# Altium PCB ADAS_Radar_Layout.PcbDoc
Units mil, origin at the board's own origin, x right, y up, seen from the top; angles counter-clockwise.
Board outline 4270 x 3565 mil, 6 copper layers (Top Layer, Layer 1, GND, Layer 2, PWR, Bottom Layer), stack 32.112 mil thick; 40 components, 65 nets, 691 pads, 46 vias.
Unrouted connection lines stored in the file: 167.
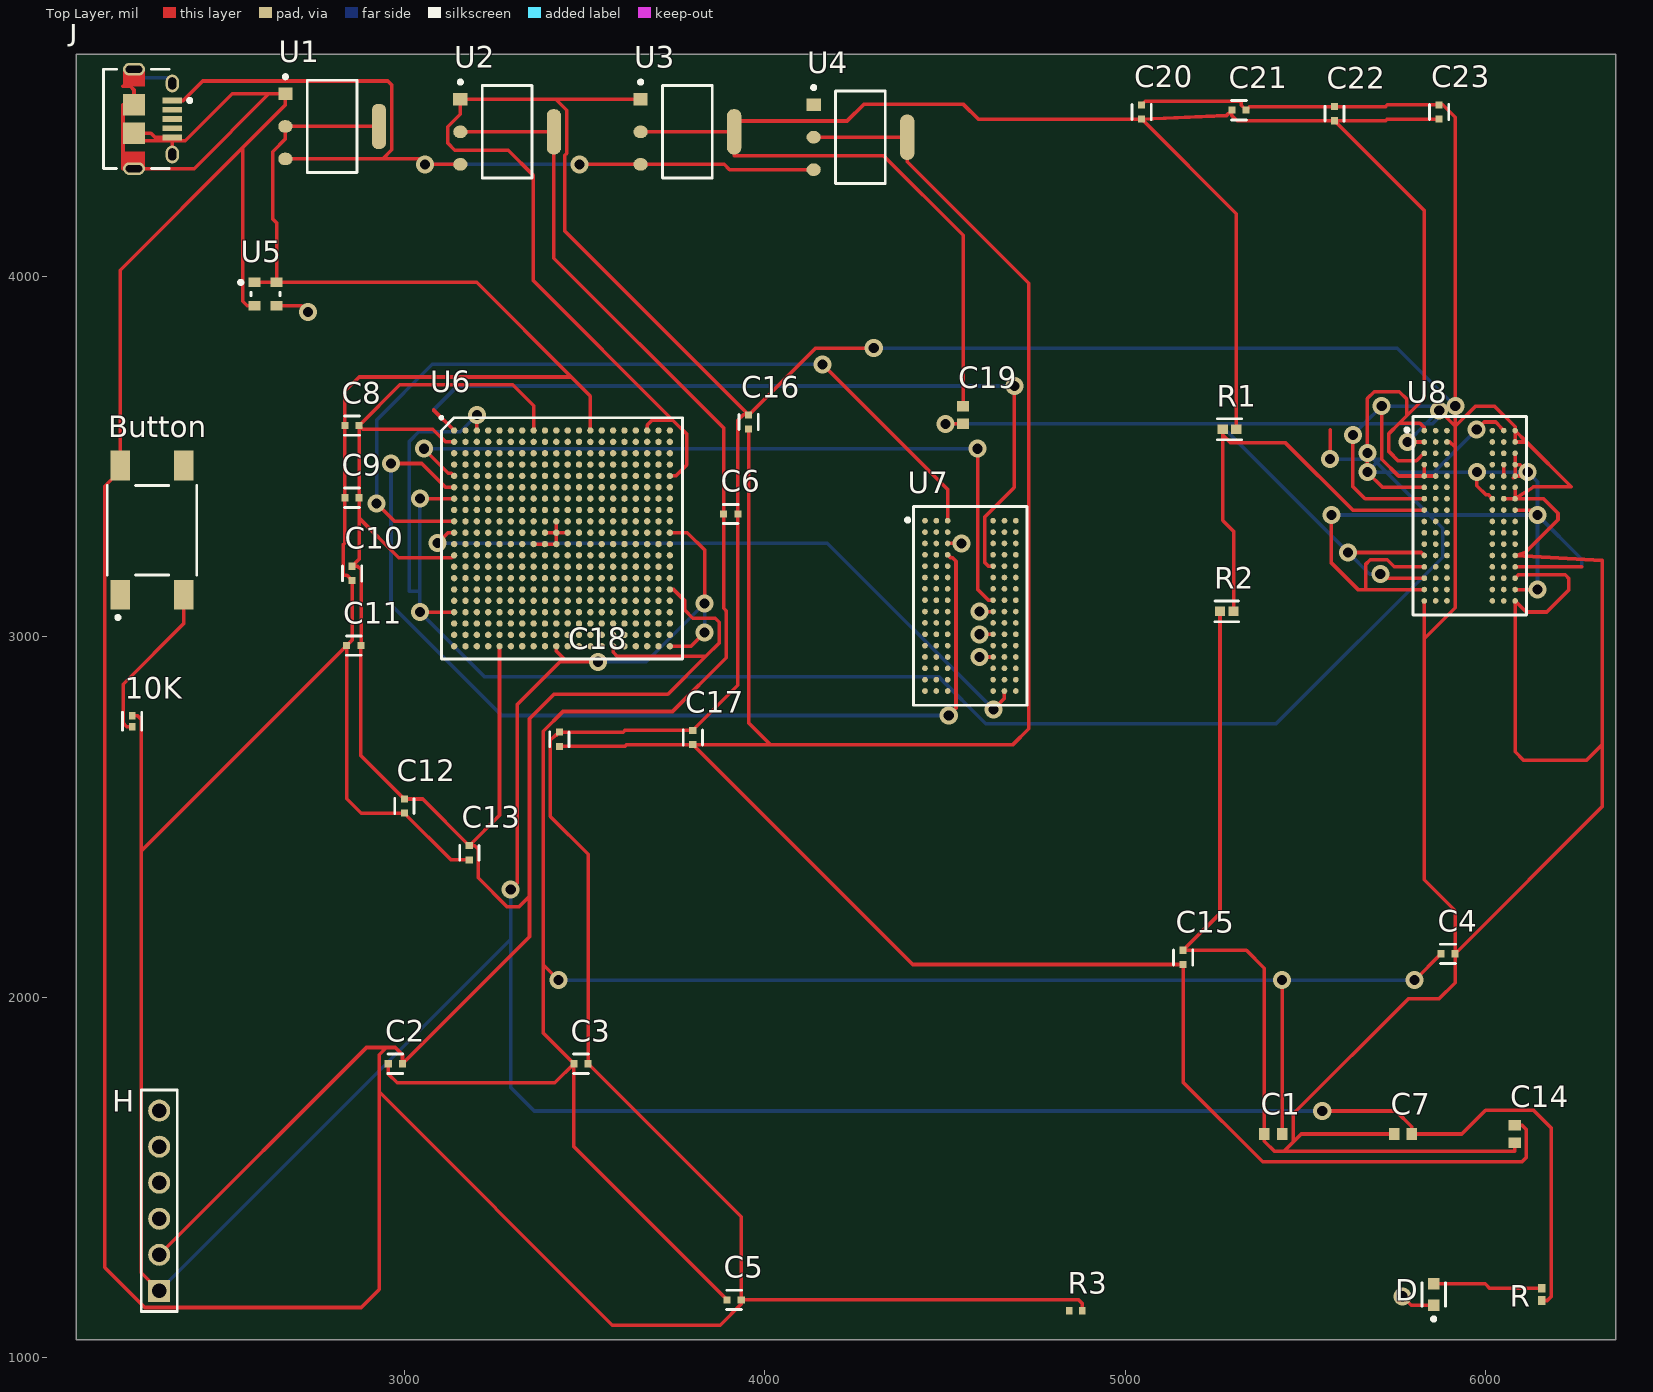
[diagram p0: Top Layer view]
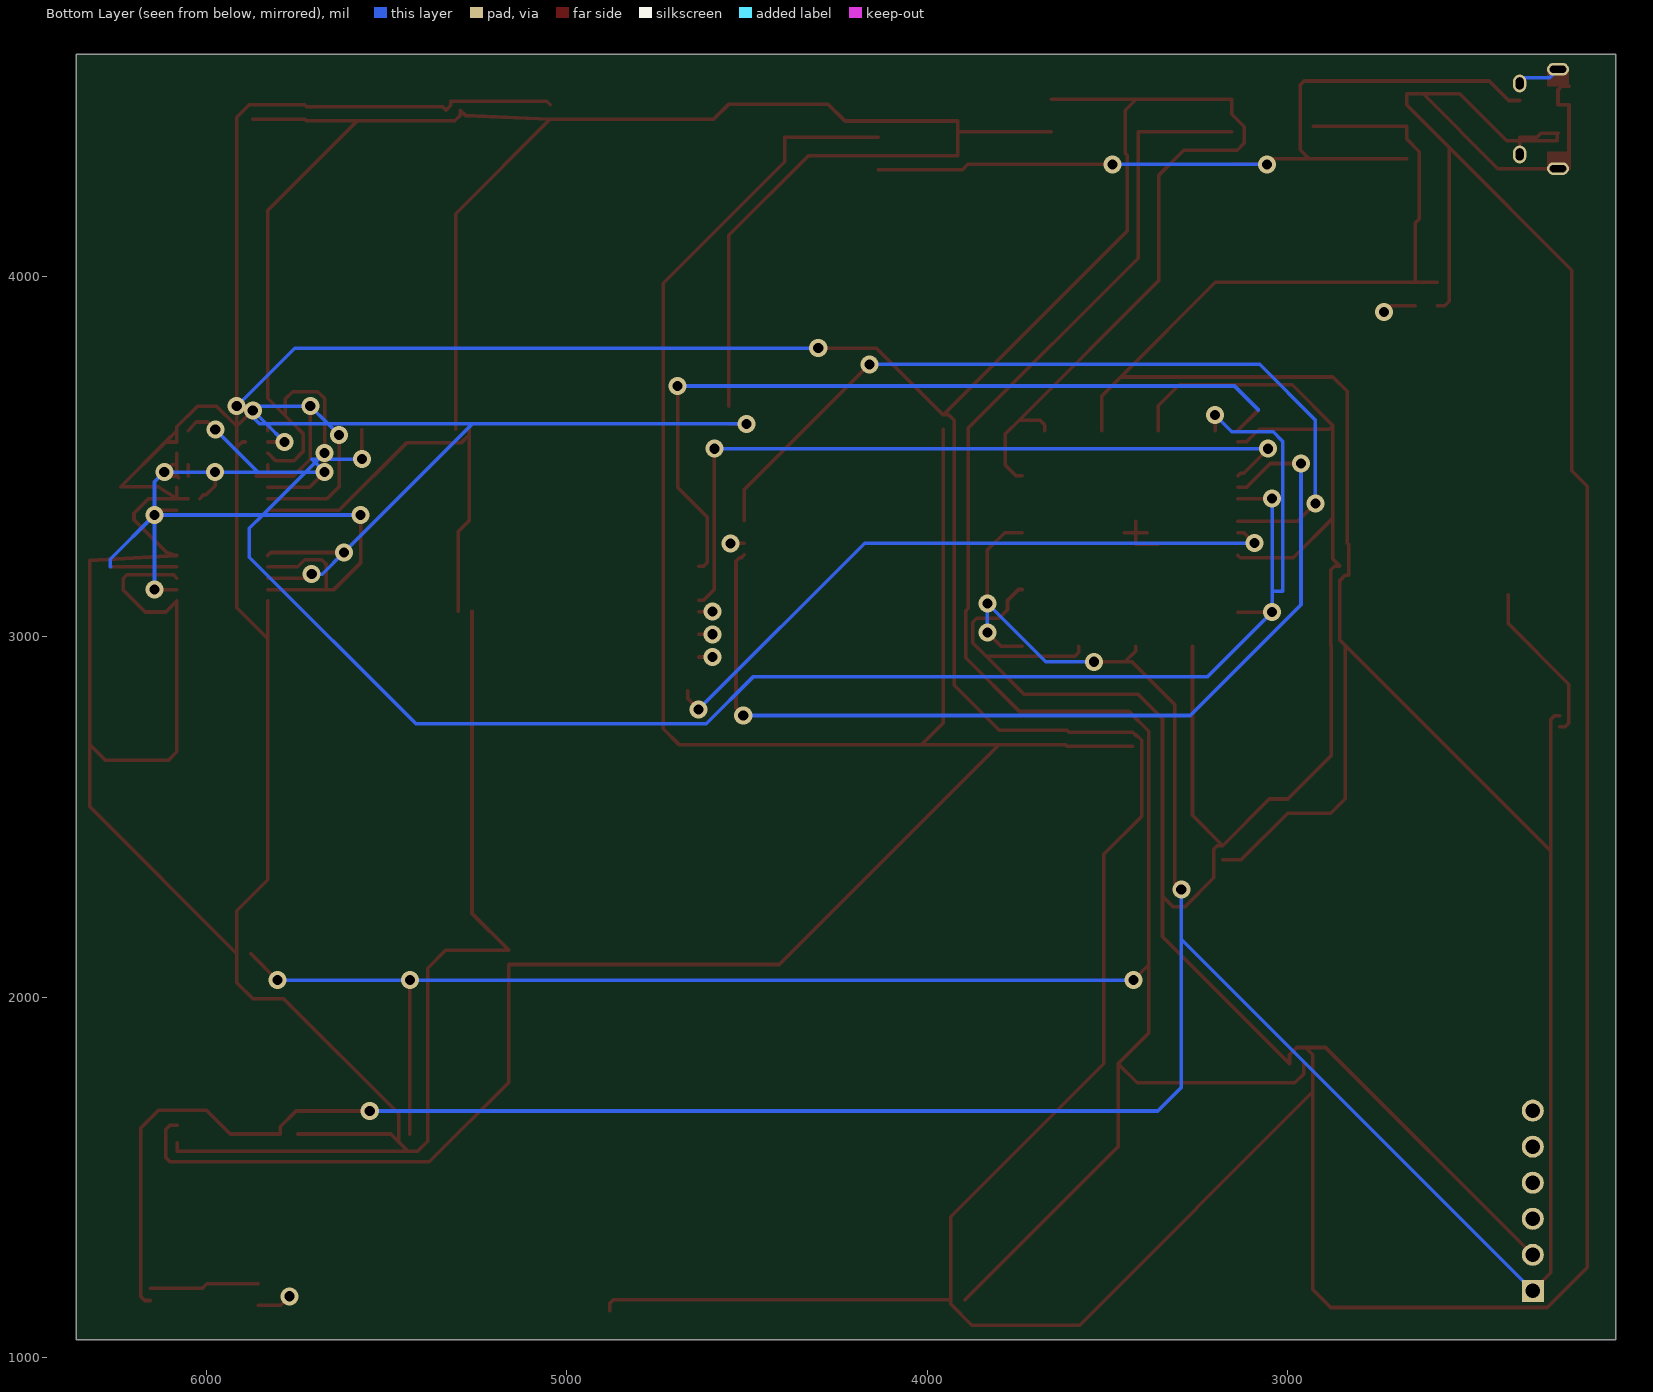
[diagram p1: Bottom Layer view, seen from below]
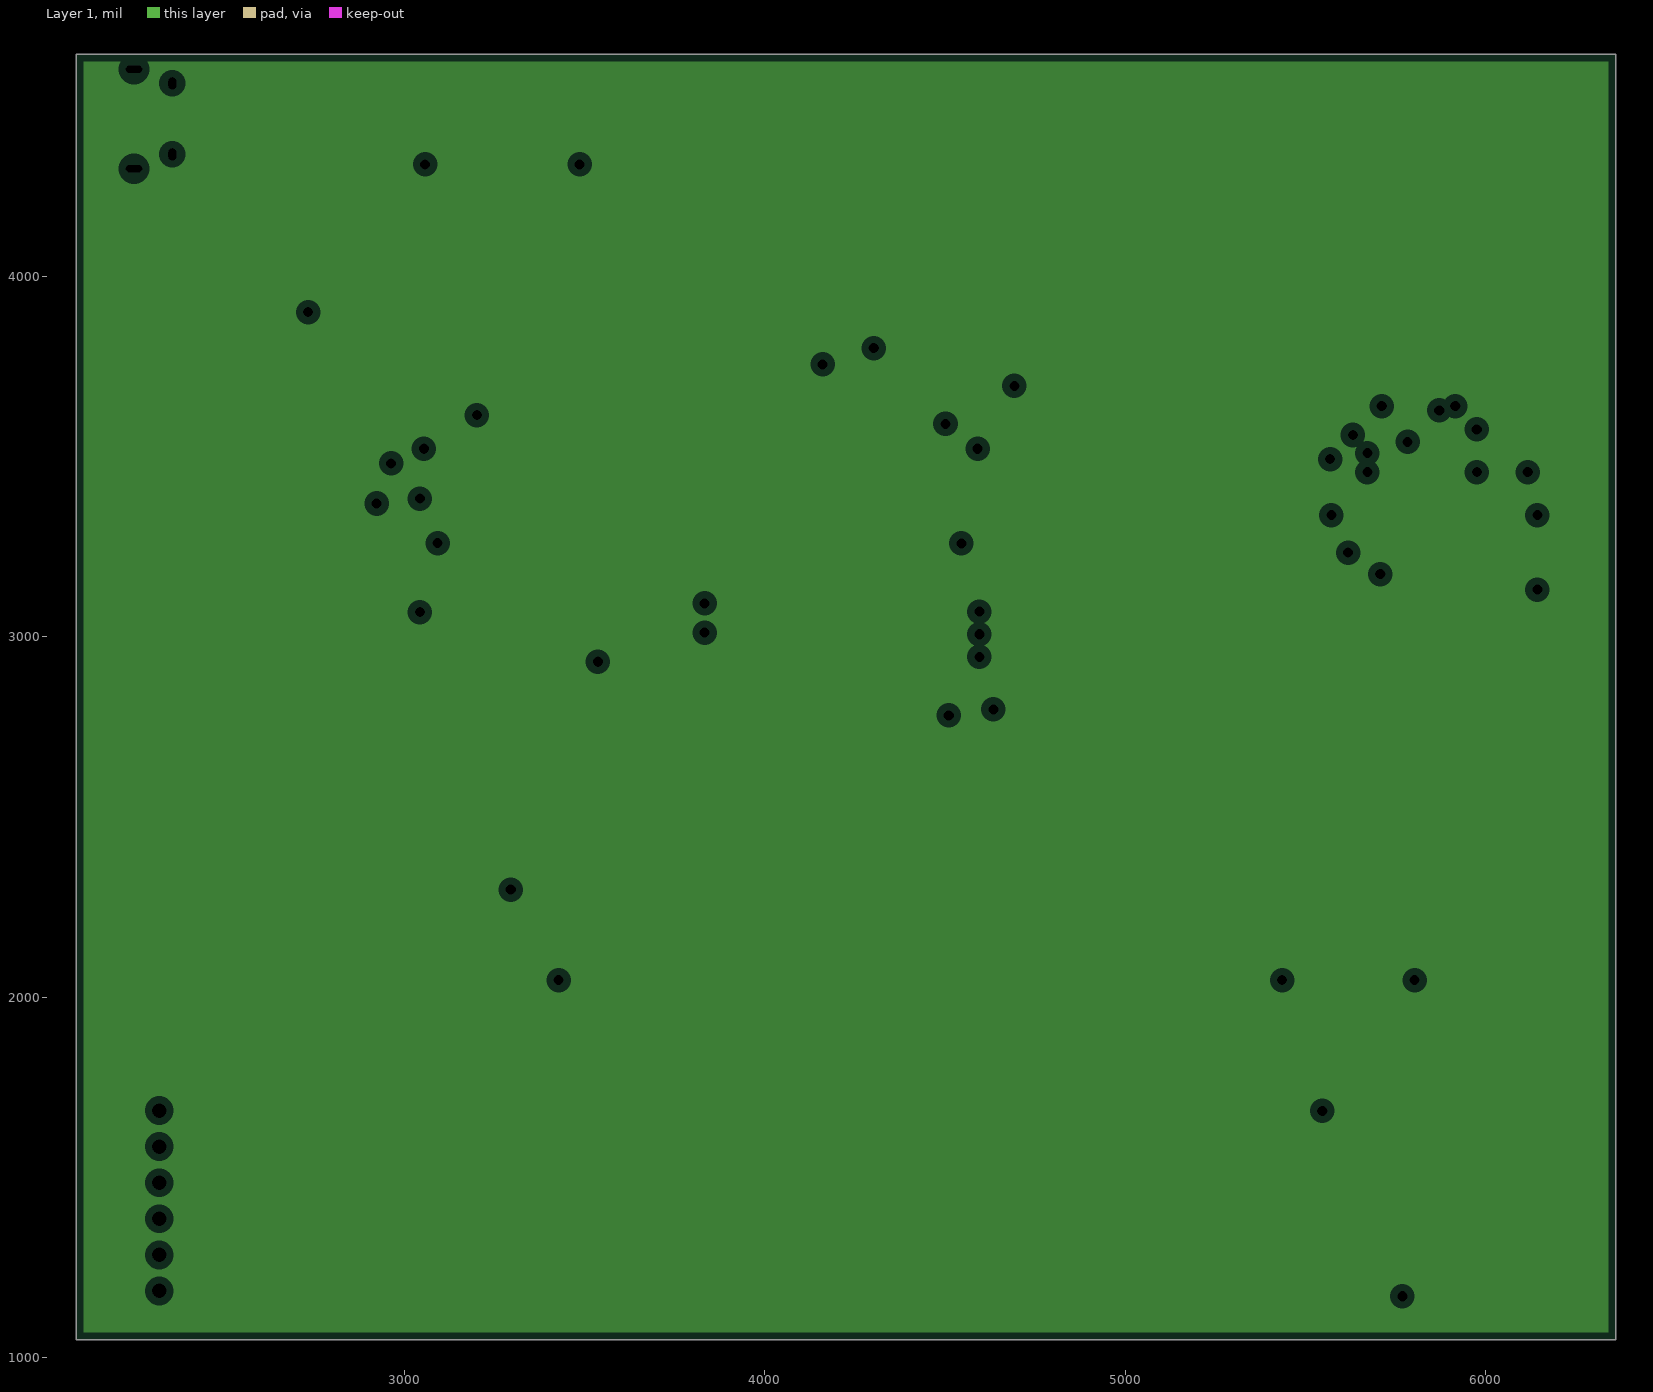
[diagram p2: Layer 1, clearances drawn from the general rule]
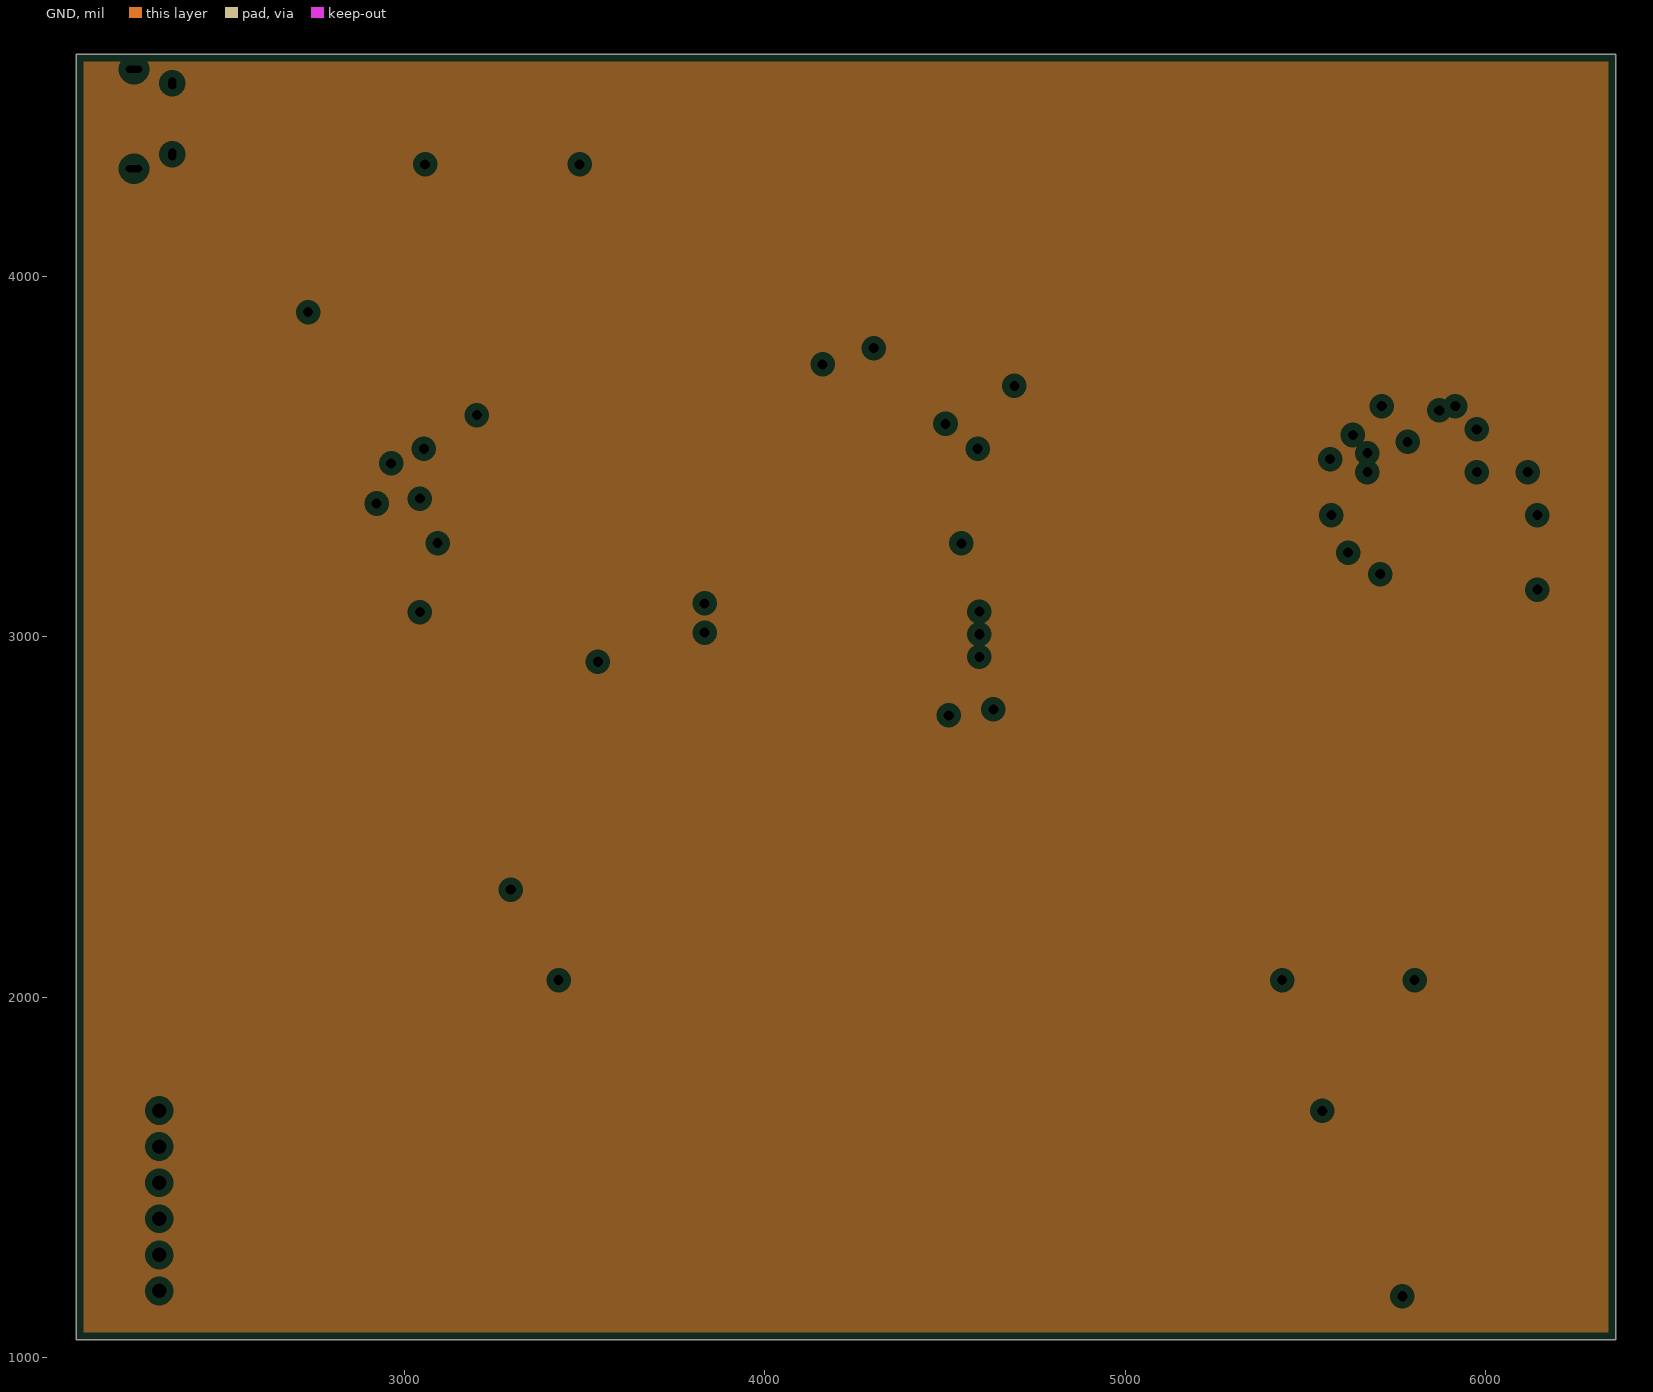
[diagram p3: GND, clearances drawn from the general rule]
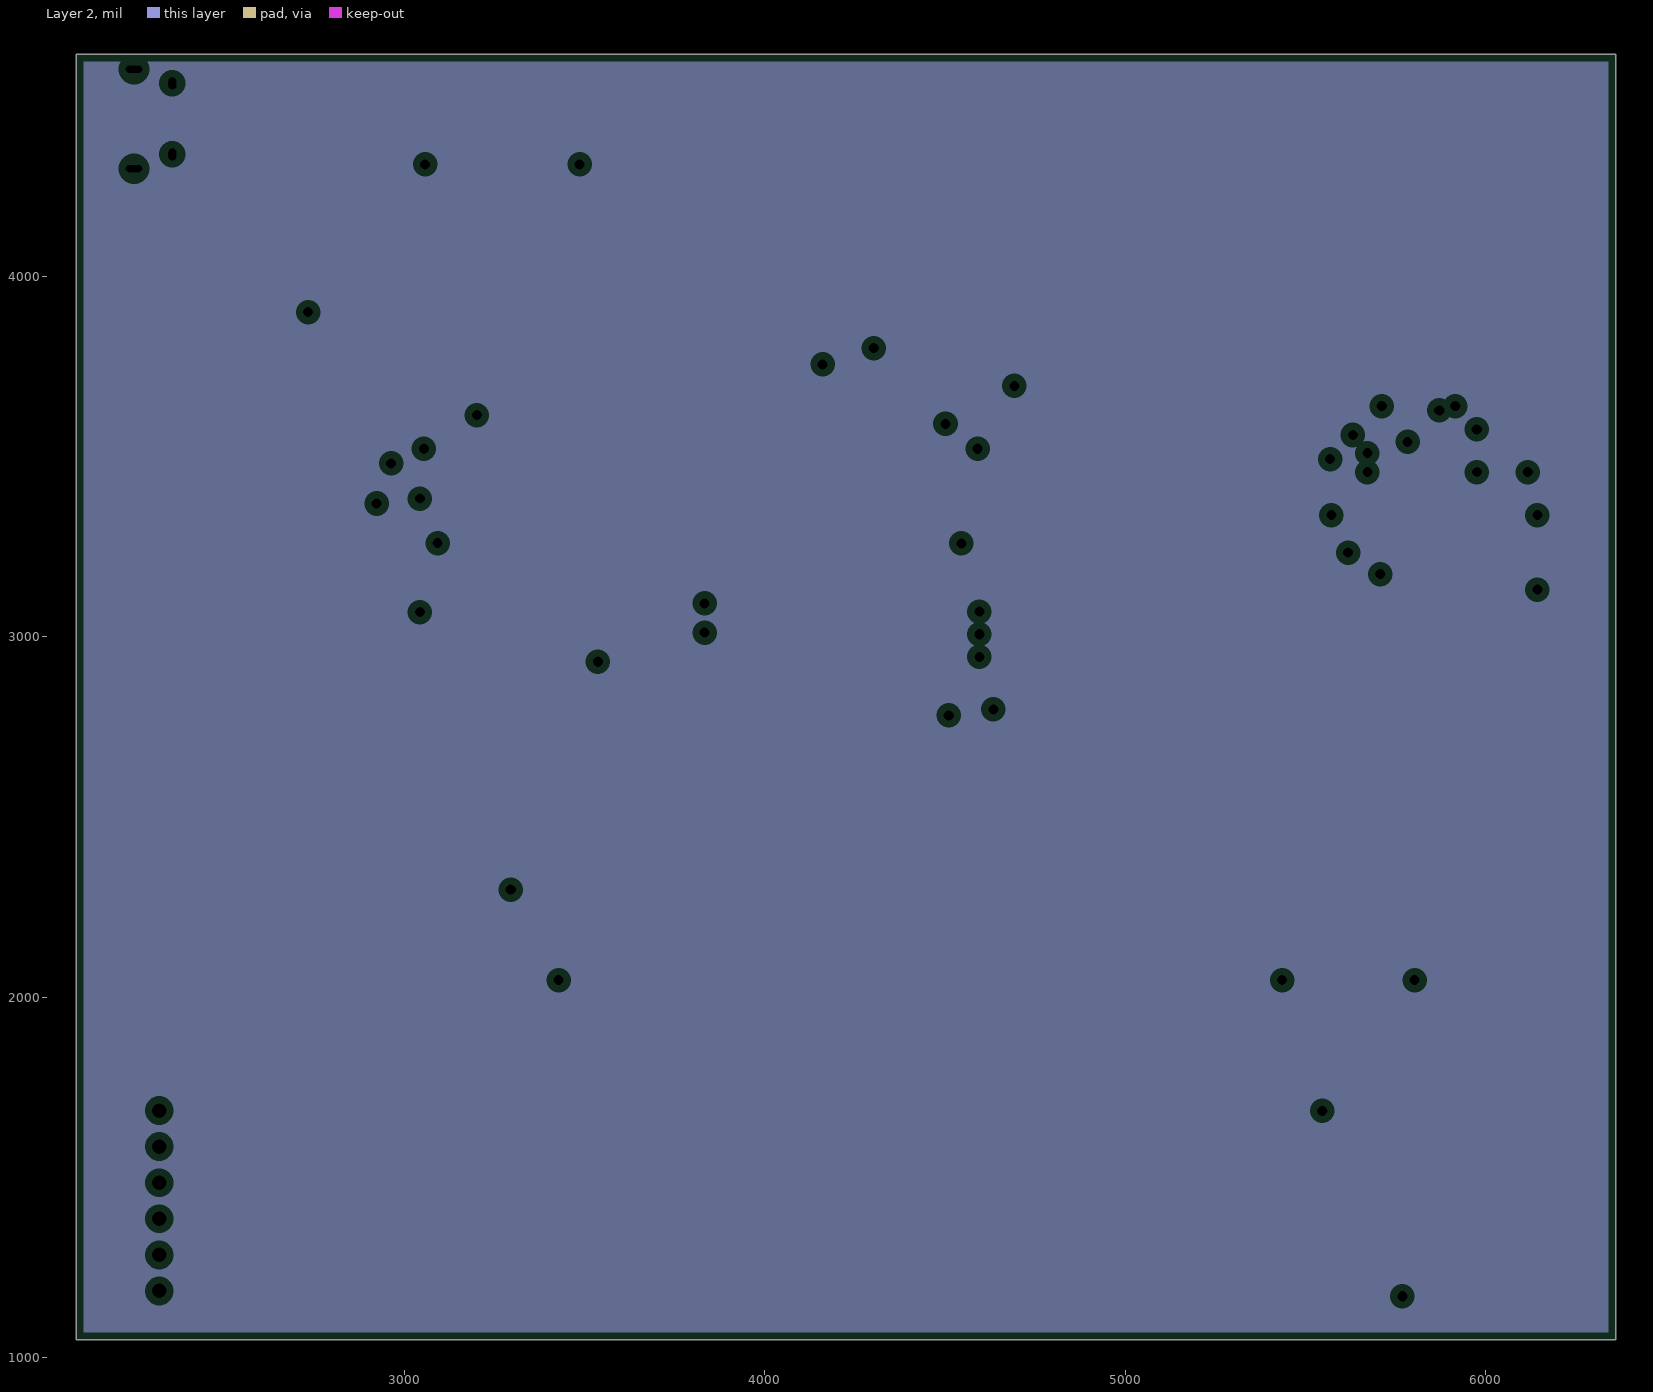
[diagram p4: Layer 2, clearances drawn from the general rule]
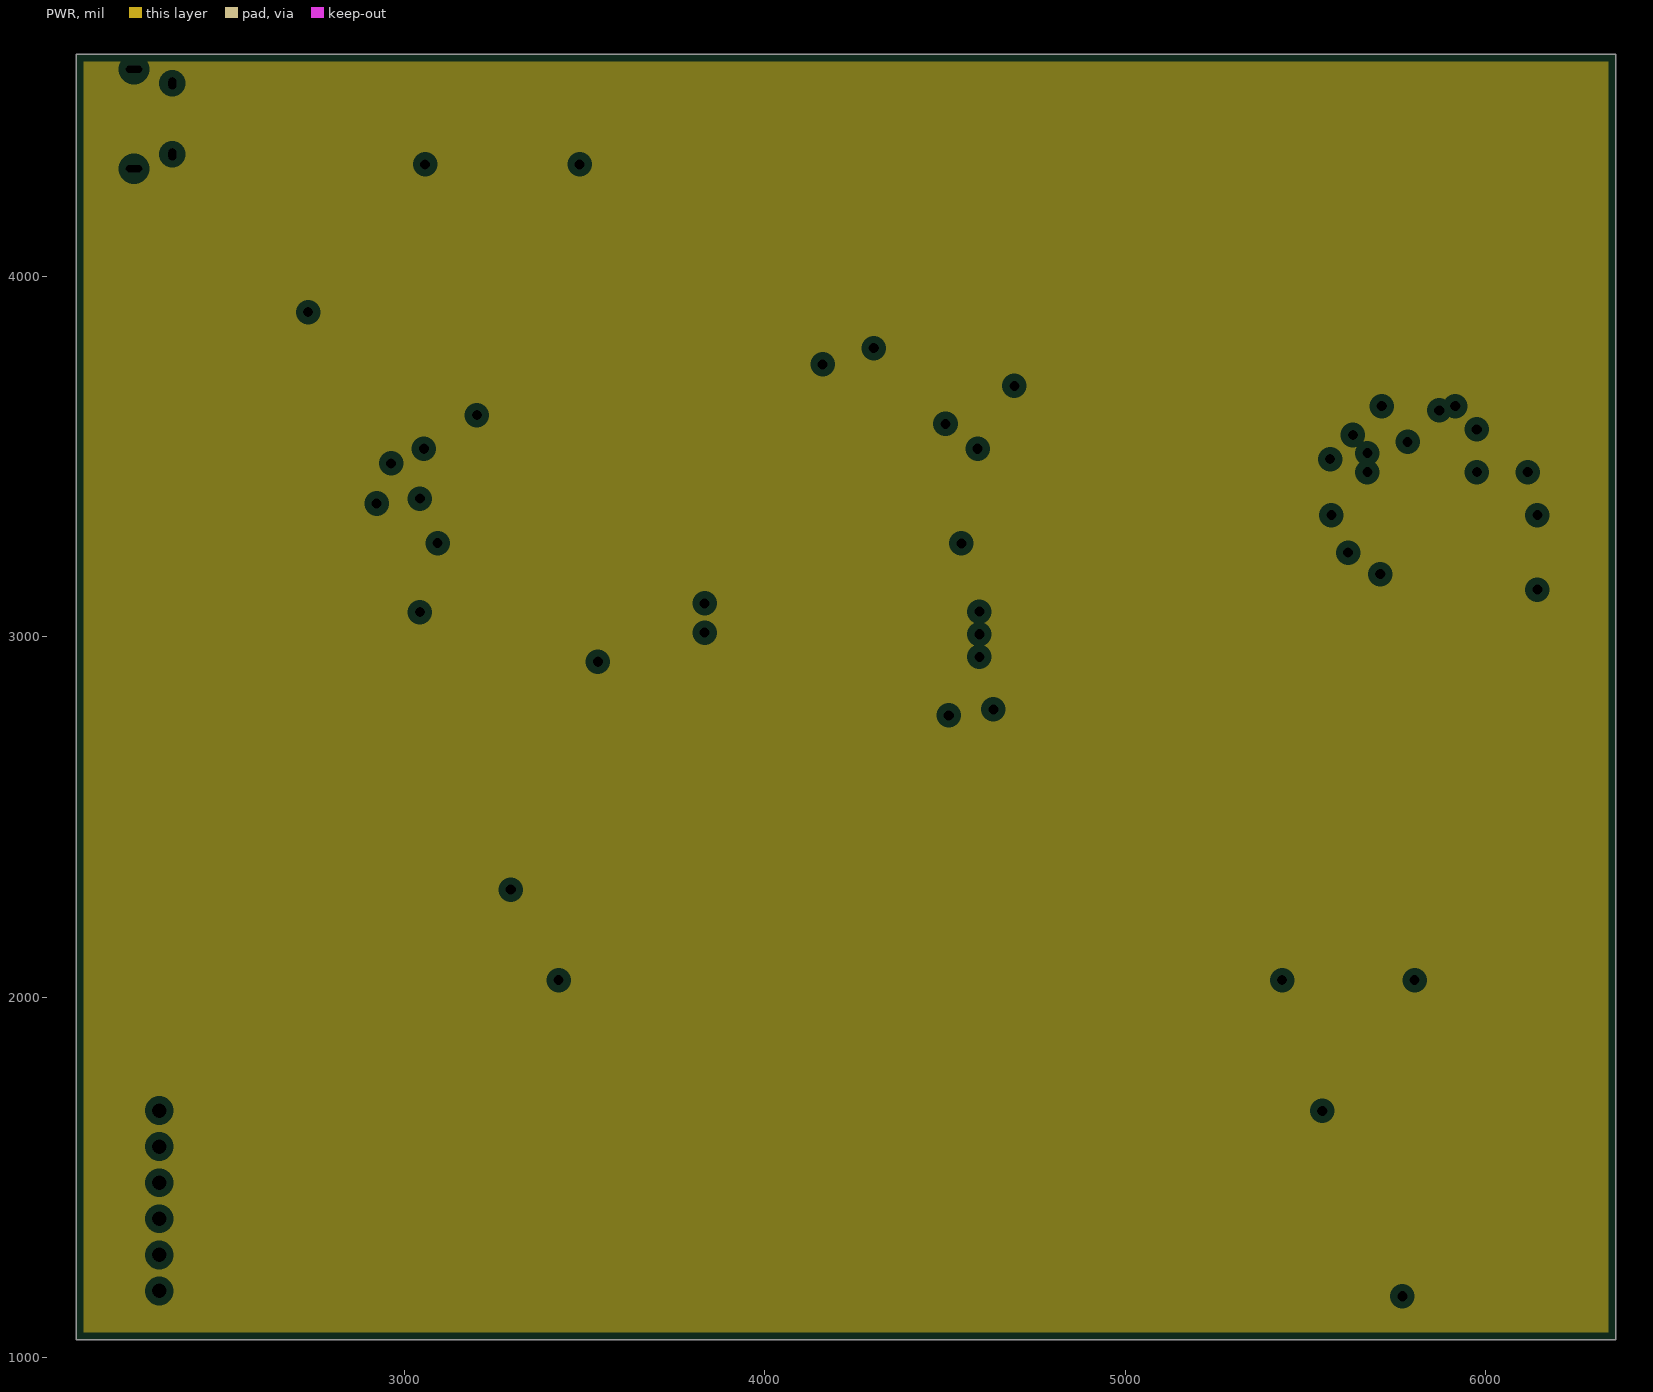
[diagram p5: PWR, clearances drawn from the general rule]

## Layer stack, top to bottom
Top Solder: solder mask 0.4, Solder Resist, Dk 3.5
Top Layer: signal copper 1.4
Dielectric 4: prepreg 2.8, PP-006, Dk 4.1
Layer 1: plane copper 1.378
Dielectric 2: prepreg 2.8, PP-006, Dk 4.1
GND: plane copper 1.378
Dielectric 1: dielectric 12.6, FR-4, Dk 4.8
Layer 2: plane copper 1.378
Dielectric 3: prepreg 2.8, PP-006, Dk 4.1
PWR: plane copper 1.378
Dielectric 5: prepreg 2.8, PP-006, Dk 4.1
Bottom Layer: signal copper 1.4
Bottom Solder: solder mask 0.4, Solder Resist, Dk 3.5

## Board outline
2090,1050 6360,1050 6360,4615 2090,4615

## Design rules (kind name [scope] priority, off if disabled: settings)
Clearance [All] p1: gap=10 ignorepadtopadclearanceinfootprint=FALSE
PlaneClearance [All] p1: clearance=20
PlaneConnect [All] p1: planeconnectstyle=Relief reliefexpansion=20 reliefentries=4 reliefconductorwidth=10 reliefairgap=10
PolygonConnect [All] p1: connectstyle=Relief reliefconductorwidth=10 reliefentries=4 polygonreliefangle="90 Angle" airgapwidth=10
RoutingVias [All] p1: holewidth=28 width=50 viastyle="Through Hole" minholewidth=28 minwidth=50 maxholewidth=28 maxwidth=50
SolderMaskExpansion [All] p1: expansion=4 istentingtop=FALSE
SupplyNets "Schematic Supply Nets" [InNet('GND')] p1: voltage=0.000
Width [All] p1: maxlimit=10 minlimit=10 preferedwidth=10
28 further rules are at their usual default settings.

## Components (designator, comment, footprint, x,y, rotation, side; value= is the part's Value field where it differs from the comment)
10K "RC0402JR-0710KL" FP-RC0402-0_4-IPC_C 2245,2765 r90 top
Button "4-1437565-1" FP-4-1437565-1-MFG 2300,3295 r90 top
C1 "CL10A475KQ8NNNC" CAPC1608X90X30LL10T20 5410,1620 r0 top
C2 "CC0402KRX7R9BB104" FP-CC0402-MFG 2975,1815 r0 top value="100 nF"
C3 "CC0402KRX7R9BB104" FP-CC0402-MFG 3490,1815 r0 top value="100 nF"
C4 "CC0402KRX7R9BB104" FP-CC0402-MFG 5895,2120 r0 top value="100 nF"
C5 "CC0402KRX7R9BB104" FP-CC0402-MFG 3914.68,1160 r0 top value="100 nF"
C6 "CC0402KRX7R9BB104" FP-CC0402-MFG 3905.32,3340 r0 top value="100 nF"
C7 "CL10A475KQ8NNNC" CAPC1608X90X30LL10T20 5770,1620 r0 top
C8 "CC0402KRX7R9BB104" FP-CC0402-MFG 2854.68,3585 r0 top value="100 nF"
C9 "CC0402KRX7R9BB104" FP-CC0402-MFG 2854.68,3385 r0 top value="100 nF"
C10 "CC0402KRX7R9BB104" FP-CC0402-MFG 2855,3175.32 r90 top value="100 nF"
C11 "CC0402KRX7R9BB104" FP-CC0402-MFG 2859.68,2975 r0 top value="100 nF"
C12 "CC0402KRX7R9BB104" FP-CC0402-MFG 3000,2529.68 r90 top value="100 nF"
C13 "CC0402KRX7R9BB104" FP-CC0402-MFG 3180,2400.32 r90 top value="100 nF"
C14 "CL10A475KQ8NNNC" CAPC1608X90X30LL10T20 6080,1620 r90 top
C15 "CC0402KRX7R9BB104" FP-CC0402-MFG 5160,2110 r90 top value="100 nF"
C16 "CC0402KRX7R9BB104" FP-CC0402-MFG 3955,3595 r90 top value="100 nF"
C17 "CC0402KRX7R9BB104" FP-CC0402-MFG 3800,2720 r90 top value="100 nF"
C18 "CC0402KRX7R9BB104" FP-CC0402-MFG 3430,2715 r90 top value="100 nF"
C19 "CL10A475KQ8NNNC" CAPC1608X90X30LL10T20 4550,3614.61 r90 top
C20 "CC0402KRX7R9BB104" FP-CC0402-MFG 5045,4455 r90 top value="100 nF"
C21 "CC0402KRX7R9BB104" FP-CC0402-MFG 5315,4460 r0 top value="100 nF"
C22 "CC0402KRX7R9BB104" FP-CC0402-MFG 5580,4450.31 r90 top value="100 nF"
C23 "CC0402KRX7R9BB104" FP-CC0402-MFG 5870,4455 r90 top value="100 nF"
D "LTST-C190KRKT" FP-LTST-C190KRKT-MFG 5855,1175 r90 top
H "TSW-106-07-G-S" SMTC-TSW-106-07-X-S 2320,1185 r90 top
J "10118194-0001LF" FCI-10118194-0001LF-5_V 2303.15,4435.63 r270 top
R "RC0402JR-07330RL" RESC1005X40X25NL05T10 6155,1175 r90 top
R1 "RC0402FR-071KL" FP-RC0402-0_4-IPC_A 5288.84,3575 r0 top
R2 "RC0402FR-071KL" FP-RC0402-0_4-IPC_A 5281.16,3070 r0 top
R3 "240R 1% 0402(1005)" RESC0402(1005)_L 4862.28,1130 r0 top value="240.00 Ohm"
U1 "AMS1117-3.3" FP-AMS1117-IPC_C 2799.72,4415 r0 top
U2 "Regulator 1V0" FP-AMS1117-IPC_C 3285,4400 r0 top
U3 "Regulator 1.5V" FP-AMS1117-IPC_C 3785,4400 r0 top
U4 "Regulator 1.8V" FP-AMS1117-IPC_C 4265,4385 r0 top
U5 "DSC1001DI1-033.3300" FP-CDFN2520-4LD-PL-1-MFG 2615,3950 r0 top
U6 "XC7Z020-1CLG400C" BGA400C80P20X20_1700X1700X160 3437.24,3272.24 r0 top
U7 "MT41K256M16TW-107:P" FP-TW-IPC_C 4570,3085 r0 top
U8 "MT41K256M16TW-107:P" FP-TW-IPC_C 5955,3335 r0 top

## Footprints (in the part's own frame and the unit in brackets; to place one, negate y for a bottom-side part, rotate by r counter-clockwise, add the part's x,y. Pads: shape width x height; smd on the part's side, far side on the other; paste and mask are expansions set on the pad)
BGA400C80P20X20_1700X1700X160 [mm]
  round 0.45 smd: A1(-7.6,7.6) A2(-6.8,7.6) A3(-6,7.6) A4(-5.2,7.6) A5(-4.4,7.6) A6(-3.6,7.6) A7(-2.8,7.6) A8(-2,7.6) A9(-1.2,7.6) A10(-0.4,7.6) A11(0.4,7.6) A12(1.2,7.6) A13(2,7.6) A14(2.8,7.6) A15(3.6,7.6) A16(4.4,7.6) A17(5.2,7.6) A18(6,7.6) A19(6.8,7.6) A20(7.6,7.6) B1(-7.6,6.8) B2(-6.8,6.8) B3(-6,6.8) B4(-5.2,6.8) B5(-4.4,6.8) B6(-3.6,6.8) B7(-2.8,6.8) B8(-2,6.8) B9(-1.2,6.8) B10(-0.4,6.8) B11(0.4,6.8) B12(1.2,6.8) B13(2,6.8) B14(2.8,6.8) B15(3.6,6.8) B16(4.4,6.8) B17(5.2,6.8) B18(6,6.8) B19(6.8,6.8) B20(7.6,6.8) C1(-7.6,6) C2(-6.8,6) C3(-6,6) C4(-5.2,6) C5(-4.4,6) C6(-3.6,6) C7(-2.8,6) C8(-2,6) C9(-1.2,6) C10(-0.4,6) C11(0.4,6) C12(1.2,6) C13(2,6) C14(2.8,6) C15(3.6,6) C16(4.4,6) C17(5.2,6) C18(6,6) C19(6.8,6) C20(7.6,6) D1(-7.6,5.2) D2(-6.8,5.2) D3(-6,5.2) D4(-5.2,5.2) D5(-4.4,5.2) D6(-3.6,5.2) D7(-2.8,5.2) D8(-2,5.2) D9(-1.2,5.2) D10(-0.4,5.2) D11(0.4,5.2) D12(1.2,5.2) D13(2,5.2) D14(2.8,5.2) D15(3.6,5.2) D16(4.4,5.2) D17(5.2,5.2) D18(6,5.2) D19(6.8,5.2) D20(7.6,5.2) E1(-7.6,4.4) E2(-6.8,4.4) E3(-6,4.4) E4(-5.2,4.4) E5(-4.4,4.4) E6(-3.6,4.4) E7(-2.8,4.4) E8(-2,4.4) E9(-1.2,4.4) E10(-0.4,4.4) E11(0.4,4.4) E12(1.2,4.4) E13(2,4.4) E14(2.8,4.4) E15(3.6,4.4) E16(4.4,4.4) E17(5.2,4.4) E18(6,4.4) E19(6.8,4.4) E20(7.6,4.4) F1(-7.6,3.6) F2(-6.8,3.6) F3(-6,3.6) F4(-5.2,3.6) F5(-4.4,3.6) F6(-3.6,3.6) F7(-2.8,3.6) F8(-2,3.6) F9(-1.2,3.6) F10(-0.4,3.6) F11(0.4,3.6) F12(1.2,3.6) F13(2,3.6) F14(2.8,3.6) F15(3.6,3.6) F16(4.4,3.6) F17(5.2,3.6) F18(6,3.6) F19(6.8,3.6) F20(7.6,3.6) G1(-7.6,2.8) G2(-6.8,2.8) G3(-6,2.8) G4(-5.2,2.8) G5(-4.4,2.8) G6(-3.6,2.8) G7(-2.8,2.8) G8(-2,2.8) G9(-1.2,2.8) G10(-0.4,2.8) G11(0.4,2.8) G12(1.2,2.8) G13(2,2.8) G14(2.8,2.8) G15(3.6,2.8) G16(4.4,2.8) G17(5.2,2.8) G18(6,2.8) G19(6.8,2.8) G20(7.6,2.8) H1(-7.6,2) H2(-6.8,2) H3(-6,2) H4(-5.2,2) H5(-4.4,2) H6(-3.6,2) H7(-2.8,2) H8(-2,2) H9(-1.2,2) H10(-0.4,2) H11(0.4,2) H12(1.2,2) H13(2,2) H14(2.8,2) H15(3.6,2) H16(4.4,2) H17(5.2,2) H18(6,2) H19(6.8,2) H20(7.6,2) J1(-7.6,1.2) J2(-6.8,1.2) J3(-6,1.2) J4(-5.2,1.2) J5(-4.4,1.2) J6(-3.6,1.2) J7(-2.8,1.2) J8(-2,1.2) J9(-1.2,1.2) J10(-0.4,1.2) J11(0.4,1.2) J12(1.2,1.2) J13(2,1.2) J14(2.8,1.2) J15(3.6,1.2) J16(4.4,1.2) J17(5.2,1.2) J18(6,1.2) J19(6.8,1.2) J20(7.6,1.2) K1(-7.6,0.4) K2(-6.8,0.4) K3(-6,0.4) K4(-5.2,0.4) K5(-4.4,0.4) K6(-3.6,0.4) K7(-2.8,0.4) K8(-2,0.4) K9(-1.2,0.4) K10(-0.4,0.4) K11(0.4,0.4) K12(1.2,0.4) K13(2,0.4) K14(2.8,0.4) K15(3.6,0.4) K16(4.4,0.4) K17(5.2,0.4) K18(6,0.4) K19(6.8,0.4) K20(7.6,0.4) L1(-7.6,-0.4) L2(-6.8,-0.4) L3(-6,-0.4) L4(-5.2,-0.4) L5(-4.4,-0.4) L6(-3.6,-0.4) L7(-2.8,-0.4) L8(-2,-0.4) L9(-1.2,-0.4) L10(-0.4,-0.4) L11(0.4,-0.4) L12(1.2,-0.4) L13(2,-0.4) L14(2.8,-0.4) L15(3.6,-0.4) L16(4.4,-0.4) L17(5.2,-0.4) L18(6,-0.4) L19(6.8,-0.4) L20(7.6,-0.4) M1(-7.6,-1.2) M2(-6.8,-1.2) M3(-6,-1.2) M4(-5.2,-1.2) M5(-4.4,-1.2) M6(-3.6,-1.2) M7(-2.8,-1.2) M8(-2,-1.2) M9(-1.2,-1.2) M10(-0.4,-1.2) M11(0.4,-1.2) M12(1.2,-1.2) M13(2,-1.2) M14(2.8,-1.2) M15(3.6,-1.2) M16(4.4,-1.2) M17(5.2,-1.2) M18(6,-1.2) M19(6.8,-1.2) M20(7.6,-1.2) N1(-7.6,-2) N2(-6.8,-2) N3(-6,-2) N4(-5.2,-2) N5(-4.4,-2) N6(-3.6,-2) N7(-2.8,-2) N8(-2,-2) N9(-1.2,-2) N10(-0.4,-2) N11(0.4,-2) N12(1.2,-2) N13(2,-2) N14(2.8,-2) N15(3.6,-2) N16(4.4,-2) N17(5.2,-2) N18(6,-2) N19(6.8,-2) N20(7.6,-2) P1(-7.6,-2.8) P2(-6.8,-2.8) P3(-6,-2.8) P4(-5.2,-2.8) P5(-4.4,-2.8) P6(-3.6,-2.8) P7(-2.8,-2.8) P8(-2,-2.8) P9(-1.2,-2.8) P10(-0.4,-2.8) P11(0.4,-2.8) P12(1.2,-2.8) P13(2,-2.8) P14(2.8,-2.8) P15(3.6,-2.8) P16(4.4,-2.8) P17(5.2,-2.8) P18(6,-2.8) P19(6.8,-2.8) P20(7.6,-2.8) R1(-7.6,-3.6) R2(-6.8,-3.6) R3(-6,-3.6) R4(-5.2,-3.6) R5(-4.4,-3.6) R6(-3.6,-3.6) R7(-2.8,-3.6) R8(-2,-3.6) R9(-1.2,-3.6) R10(-0.4,-3.6) R11(0.4,-3.6) R12(1.2,-3.6) R13(2,-3.6) R14(2.8,-3.6) R15(3.6,-3.6) R16(4.4,-3.6) R17(5.2,-3.6) R18(6,-3.6) R19(6.8,-3.6) R20(7.6,-3.6) T1(-7.6,-4.4) T2(-6.8,-4.4) T3(-6,-4.4) T4(-5.2,-4.4) T5(-4.4,-4.4) T6(-3.6,-4.4) T7(-2.8,-4.4) T8(-2,-4.4) T9(-1.2,-4.4) T10(-0.4,-4.4) T11(0.4,-4.4) T12(1.2,-4.4) T13(2,-4.4) T14(2.8,-4.4) T15(3.6,-4.4) T16(4.4,-4.4) T17(5.2,-4.4) T18(6,-4.4) T19(6.8,-4.4) T20(7.6,-4.4) U1(-7.6,-5.2) U2(-6.8,-5.2) U3(-6,-5.2) U4(-5.2,-5.2) U5(-4.4,-5.2) U6(-3.6,-5.2) U7(-2.8,-5.2) U8(-2,-5.2) U9(-1.2,-5.2) U10(-0.4,-5.2) U11(0.4,-5.2) U12(1.2,-5.2) U13(2,-5.2) U14(2.8,-5.2) U15(3.6,-5.2) U16(4.4,-5.2) U17(5.2,-5.2) U18(6,-5.2) U19(6.8,-5.2) U20(7.6,-5.2) V1(-7.6,-6) V2(-6.8,-6) V3(-6,-6) V4(-5.2,-6) V5(-4.4,-6) V6(-3.6,-6) V7(-2.8,-6) V8(-2,-6) V9(-1.2,-6) V10(-0.4,-6) V11(0.4,-6) V12(1.2,-6) V13(2,-6) V14(2.8,-6) V15(3.6,-6) V16(4.4,-6) V17(5.2,-6) V18(6,-6) V19(6.8,-6) V20(7.6,-6) W1(-7.6,-6.8) W2(-6.8,-6.8) W3(-6,-6.8) W4(-5.2,-6.8) W5(-4.4,-6.8) W6(-3.6,-6.8) W7(-2.8,-6.8) W8(-2,-6.8) W9(-1.2,-6.8) W10(-0.4,-6.8) W11(0.4,-6.8) W12(1.2,-6.8) W13(2,-6.8) W14(2.8,-6.8) W15(3.6,-6.8) W16(4.4,-6.8) W17(5.2,-6.8) W18(6,-6.8) W19(6.8,-6.8) W20(7.6,-6.8) Y1(-7.6,-7.6) Y2(-6.8,-7.6) Y3(-6,-7.6) Y4(-5.2,-7.6) Y5(-4.4,-7.6) Y6(-3.6,-7.6) Y7(-2.8,-7.6) Y8(-2,-7.6) Y9(-1.2,-7.6) Y10(-0.4,-7.6) Y11(0.4,-7.6) Y12(1.2,-7.6) Y13(2,-7.6) Y14(2.8,-7.6) Y15(3.6,-7.6) Y16(4.4,-7.6) Y17(5.2,-7.6) Y18(6,-7.6) Y19(6.8,-7.6) Y20(7.6,-7.6)
  silkscreen extent -8.6,-8.5 8.5,8.6
CAPC1608X90X30LL10T20 [mm] "Chip Capacitor, 2-Leads, Body 1.70x0.90mm, IPC High Density"
  rect 0.75x0.85 smd: 1(-0.625,0) 2(0.625,0)
  body extent -0.85,-0.45 0.85,0.45, height 0.9
FCI-10118194-0001LF-5_V [mm] "SMD, 5-Leads, Body 7x5mm, Pitch 0.65 mm"
  rect 0.4x1.35 smd: 1(-1.3,1.35) 2(-0.65,1.35) 3(0,1.35) 4(0.65,1.35) 5(1.3,1.35)
  oval 1.25x0.95 hole 0.55 slot 0.85 at 0 deg: 6(-2.5,1.35) 7(2.5,1.35)
  oval 0.9x1.55 hole 0.5 slot 1.15 at 90 deg: 8(-3.5,-1.35) 9(3.5,-1.35)
  rect 1.5x1.55 smd: 10(-1,-1.35) 11(1,-1.35)
  Top Layer region: 3.499,-2.126 3.499,-0.576 2.299,-0.576 2.299,-2.126
  Top Layer region: -2.301,-2.126 -2.301,-0.576 -3.501,-0.576 -3.501,-2.126
  silkscreen extent -3.5,-3.5 3.5,2.7, body extent -4.02,-4.03 4.02,1.55, height 2.72
FP-4-1437565-1-MFG [mm]
  rect 2.1x1.38 smd paste+0 mask+0: 1(-4.55,2.24) 2(4.55,2.24) 3(-4.55,-2.24) 4(4.55,-2.24)
  silkscreen extent -6.27,-3.15 3.15,3.15
FP-AMS1117-IPC_C [mm]
  rect 1.004x0.872 smd paste+0 mask+0: 1(-3.295,2.29)
  rrect100% 1.004x0.872 smd paste+0 mask+0: 2(-3.295,0) 3(-3.295,-2.29)
  rrect87% 1.004x3.182 smd paste+0 mask+0: 4(3.295,0)
  silkscreen extent -3.42,-3.25 1.75,3.62, body extent -3.9,-3.35 3.9,3.35, height 0.25
FP-CC0402-MFG [mm]
  rect 0.5x0.5 smd paste+0 mask+0: 1(-0.5,0) 2(0.5,0)
  silkscreen extent -0.53,-0.68 0.53,0.67, body extent -0.87,-0.48 0.87,0.48, height 0.25
FP-CDFN2520-4LD-PL-1-MFG [mm]
  rect 0.85x0.65 smd paste+0 mask+0: 1(-0.775,0.825) 2(-0.775,-0.825) 3(0.775,-0.825) 4(0.775,0.825)
  silkscreen extent -1.87,-0.13 1.02,0.95, body extent -1.3,-1.38 1.3,1.38, height 0.25
FP-LTST-C190KRKT-MFG [mm]
  rect 0.8x0.8 smd paste+0 mask+0: 1(-0.75,0) 2(0.75,0)
  silkscreen extent -1.85,-0.82 0.82,0.82, body extent -1.25,-0.55 1.25,0.55, height 0.25
FP-RC0402-0_4-IPC_A [mil]
  rect 28.16x26.48 smd paste+0 mask+0: 1(-18.84,0) 2(18.84,0)
  silkscreen extent -33,-29 33,29, body extent -41,-21 41,21, height 10
FP-RC0402-0_4-IPC_C [mil]
  rect 20.29x18.6 smd paste+0 mask+0: 1(-14.9,0) 2(14.9,0)
  silkscreen extent -25,-27 25,27, body extent -29,-15 29,15, height 10
FP-TW-IPC_C [mm]
  round 0.399 smd paste+0 mask+0: A1(-3.2,6) A2(-2.4,6) A3(-1.6,6) A7(1.6,6) A8(2.4,6) A9(3.2,6) B1(-3.2,5.2) B2(-2.4,5.2) B3(-1.6,5.2) B7(1.6,5.2) B8(2.4,5.2) B9(3.2,5.2) C1(-3.2,4.4) C2(-2.4,4.4) C3(-1.6,4.4) C7(1.6,4.4) C8(2.4,4.4) C9(3.2,4.4) D1(-3.2,3.6) D2(-2.4,3.6) D3(-1.6,3.6) D7(1.6,3.6) D8(2.4,3.6) D9(3.2,3.6) E1(-3.2,2.8) E2(-2.4,2.8) E3(-1.6,2.8) E7(1.6,2.8) E8(2.4,2.8) E9(3.2,2.8) F1(-3.2,2) F2(-2.4,2) F3(-1.6,2) F7(1.6,2) F8(2.4,2) F9(3.2,2) G1(-3.2,1.2) G2(-2.4,1.2) G3(-1.6,1.2) G7(1.6,1.2) G8(2.4,1.2) G9(3.2,1.2) H1(-3.2,0.4) H2(-2.4,0.4) H3(-1.6,0.4) H7(1.6,0.4) H8(2.4,0.4) H9(3.2,0.4) J1(-3.2,-0.4) J2(-2.4,-0.4) J3(-1.6,-0.4) J7(1.6,-0.4) J8(2.4,-0.4) J9(3.2,-0.4) K1(-3.2,-1.2) K2(-2.4,-1.2) K3(-1.6,-1.2) K7(1.6,-1.2) K8(2.4,-1.2) K9(3.2,-1.2) L1(-3.2,-2) L2(-2.4,-2) L3(-1.6,-2) L7(1.6,-2) L8(2.4,-2) L9(3.2,-2) M1(-3.2,-2.8) M2(-2.4,-2.8) M3(-1.6,-2.8) M7(1.6,-2.8) M8(2.4,-2.8) M9(3.2,-2.8) N1(-3.2,-3.6) N2(-2.4,-3.6) N3(-1.6,-3.6) N7(1.6,-3.6) N8(2.4,-3.6) N9(3.2,-3.6) P1(-3.2,-4.4) P2(-2.4,-4.4) P3(-1.6,-4.4) P7(1.6,-4.4) P8(2.4,-4.4) P9(3.2,-4.4) R1(-3.2,-5.2) R2(-2.4,-5.2) R3(-1.6,-5.2) R7(1.6,-5.2) R8(2.4,-5.2) R9(3.2,-5.2) T1(-3.2,-6) T2(-2.4,-6) T3(-1.6,-6) T7(1.6,-6) T8(2.4,-6) T9(3.2,-6)
  silkscreen extent -4.55,-7 4,7, body extent -4.1,-7.1 4.1,7.1, height 0.25
RESC0402(1005)_L [mm] "Chip Resistor, Body 1.0x0.5mm, IPC High Density"
  rect 0.45x0.55 smd: 1(-0.45,0) 2(0.45,0)
  body extent -0.52,-0.27 0.53,0.28, height 0.4
RESC1005X40X25NL05T10 [mm] "Chip Resistor, 2-Leads, Body 1.00x0.50mm, IPC Medium Density"
  rect 0.6x0.55 smd: 1(-0.425,0) 2(0.425,0)
  body extent -0.53,-0.27 0.53,0.28, height 0.4
SMTC-TSW-106-07-X-S [mm] ".025 SQ Post Terminal Strip Assembly, 1x6 Pins, Vertical, 2.54mm Pitch, Male"
  rect 1.55x1.55 hole 1.02: 1(0,0)
  round 1.55 hole 1.02: 2(2.54,0) 3(5.08,0) 4(7.62,0) 5(10.16,0) 6(12.7,0)
  silkscreen extent -1.46,-1.27 14.16,1.27, body extent -1.27,-1.24 13.97,1.3, height 8.38

## Part data
10K: library part CMP-2002-07915-3, "RES 10K OHM 5% 1/16W 0402", Case Code (Imperial)=0402, Case Code (Metric)=1005, Max Operating Temperature=155°C, Max Power Dissipation=63mW, Min Operating Temperature=-55°C, Package Quantity=1, Power Rating=62.5mW, Resistance=10kR, Resistance Tolerance=5%, Resistor Type="Thick Film", Temperature Coefficient=100ppm/°C, Voltage Rating=50V, Case/Package=0402, Construction=Rectangular, Depth=0.5mm, Features="Moisture Resistant", Height=0.016inch, Lead Free="Lead Free", Length=0.039inch, Military Standard=Not, Number of Terminations=2, Packaging="Tape and Reel", RoHS Compliant=Yes, Series=RC, Size Code=0402, Termination=SMD/SMT, Tolerance=5%, Width=0.02inch
Button: library part CMP-03407-000003-1, "SWITCH TACTILE SPST-NO 0.05A 24V", Contact Current Rating=50mA, Contact Resistance=100mΩ, Manufacturer="TE Connectivity", Operating Force=160gf, Package=0, Temperature="-35°C to +85°C", Temperature Range High=+85°C, Temperature Range Low=-35°C, Voltage Rating Dc=24V, Automotive=No, Category=Switch, Ciiva Ids=2672442, ComponentLink2Description=Datasheet, ComponentLink2URL=https://www.te.com/commerce/DocumentDelivery/DDEController?Action=showdoc&DocId=Customer+Drawing%7F2-1437565-7%7FV%7Fpdf%7FEnglish%7FENG_CD_2-1437565-7_V.pdf%7F4-1437565-1, Device Class L1=Electromechanical, Device Class L2=Switches, Device Class L3="Tactile Switches", Digikey Description="SWITCH TACTILE SPST-NO 0.05A 24V", Electromechanical Life=100000Cycles, Height=5.38mm, Import Ts=1521848451, Lead Free=Yes, Manufacturer Part Number=4-1437565-1, Mount="Surface Mount", Mouser Description="Switch Tactile OFF (ON) SPST Round Button Gull Wing 0.05A 12VDC 1.57N SMD Loose Piece", Octopart=https://octopart.com/fsm4jsma-te+connectivity-55488004, Release Date=1503379960, RoHS=TRUE, Standoff Height=0.05mm, Throw Configuration=SPST-NO
C1 C7 C14 C19: library part CMP-2000-06090-1, "Chip Capacitor, 4.7 uF, +/- 10%, 6.3 V, -55 to 85 degC, 0603 (1608 Metric), RoHS, Tape and Reel", Capacitance=4700000pF, Case Size/Dimension=0603, Dielectric=X5R, Manufacturer="Samsung Electro-Mechanics", Package Description="2-Pin Surface Mount Device, Body 1.60 x 0.80 mm", Rated Voltage=6.3V, Tolerance (%)=±10%, Datasheet URL=http://www.samsungsem.com/kr/support/product-search/mlcc/__icsFiles/afieldfile/2016/08/18/S_CL10A475KQ8NNNC.pdf, Datasheet Version=07/2016, Manufacturer URL=http://www.samsungsem.com/global/index.jsp, Mounting Technology=SurfaceMount, Package Reference=0603
C2 C3 C4 C5 C6 C8 C9 C10 C11 C12 C13 C15 C16 C17 C18 C20 C21 C22 C23: library part CMP-03422-001010-1, "CAP CER 0.1UF 50V X7R 0402", Capacitance="100 nF", Manufacturer=YAGEO, Package=CC0402, Temperature="-55°C to +125°C", Temperature Characteristic=X7R, Temperature Coefficient=30ppm/°C, Temperature Range High=+125°C, Temperature Range Low=-55°C, Tolerance=0.1, Voltage Rating="50 V", Automotive=No, Automotive Grade=NA, Category=Cap, ComponentLink2Description=Datasheet, ComponentLink2URL=http://www.yageo.com/documents/recent/UPY-GP_NP0_16V-to-50V_16.pdf, Device Class L1="Passive Components", Device Class L2=Capacitors, Device Class L3="Ceramic Capacitors", Digikey Description="CAP CER 0.1UF 50V X7R 0402", Footprint Url=http://www.yageo.com/exep/pages/download/literatures/UPY-C_GEN_24.pdf, Height=0.55mm, Ipc Land Pattern Name=CAPC10050X50, Lead Free=Yes, Manufacturer Part Number=CC0402KRX7R9BB104, Material=Ceramic, Octopart=https://octopart.com/cc0402krx7r9bb104-yageo-56536067, RoHS=TRUE
D: library part CMP-1674-00011-2, "LED RED CLEAR CHIP SMD", Case Code (Imperial)=0603, Case Code (Metric)=1608, Color=Red, Forward Current=30mA, Forward Voltage=2.4V, Lens Color=Colorless, Max Operating Temperature=85°C, Min Operating Temperature=-55°C, Package Quantity=1, Power Dissipation=75mW, Reverse Voltage=5V, Test Current=20mA, Case/Package=0603, Depth=0.8mm, Dominant Wavelength=631nm, Height=0.8mm, Illumination Color=Red, Lead Free="Lead Free", Length=1.6mm, Lens Style=Diffused, Lens Transparency=Clear, Luminous Intensity=54mcd, Mount="Surface Mount", Number of Elements=1, Number of LEDs=1, Number of Pins=2, Packaging="Tape and Reel", Power Rating=75mW, Radiation Hardening=No, Viewing Angle=130°, Wavelength=639nm, Width=0.8mm
H: library part CMP-1024-00383-1, "0.025\" SQ Post Header, Through-hole, Vertical, -55 to 125 degC, 2.54 mm Pitch, 6-Pin, Male, RoHS", Manufacturer=Samtec, Temperature Range="-55 to 125 degC", ComponentLink1Description="Manufacturer URL", ComponentLink1URL=http://www.samtec.com, ComponentLink2Description=Datasheet, ComponentLink2URL=http://www.samtec.com/documents/webfiles/pdf/TSW_TH.PDF, ComponentLink3Description="Package Specification", ComponentLink3URL=http://www.samtec.com/documents/webfiles/cpdf/TSW-XXX-XX-XXX-X-XX-XXX-MKT.pdf, DatasheetVersion=F-214, Mounting Technology=Through-hole, Orientation=Vertical, PackageDescription=".025[0.64] SQ. Post Terminal Strip Assembly", PackageReference=TSW-106-07-X-S, PackageVersion="DM, 8/1988", PartNumber=TSW-106-07-G-S, Pitch="2.54 mm", RoHS=True
J: library part CMP-2000-05120-1, "Micro USB B Type Receptacle, 1.8 A, -55 to 85 degC, 5-Pin SMD, RoHS, Tape and Reel", Manufacturer="Amphenol FCI", Package Description="5-Pin Surface Mount Device, Body 8.05 x 5.53 mm, Pitch 0.65 mm", Package Reference=10118194-0001LF-5, Body Orientation=RightAngle, Datasheet URL=https://datasheet.ciiva.com/26945/getdatasheetpartid-418619-26945695.pdf, Datasheet Version="Rev. A, 10/2011", Gender=RCP, Manufacturer URL=http://www.fci.com/, Mounting=SurfaceMount, Number of Contacts=5, Packaging=CutTape, Pitch=0.65mm, Rad Hard=No, Termination Method=Solder, Type=MicroUSBTypeB
R: library part CMP-2002-07985-1, Manufacturer="Yageo / Phycomp", Part Number=RC0402JR-07330RL
R1 R2: library part CMP-2002-07472-3, "RES 1K OHM 1% 1/16W 0402", Case Code (Imperial)=0402, Case Code (Metric)=1005, Max Operating Temperature=155°C, Max Power Dissipation=63mW, Min Operating Temperature=-55°C, Power Rating=62.5mW, Resistance=1kR, Resistance Tolerance=1%, Resistor Type="Thick Film", Temperature Coefficient=100ppm/°C, Voltage Rating=50V, Case/Package=0402, Construction=Rectangular, Depth=0.5mm, Features="Moisture Resistant", Height=0.32mm, Lead Free="Lead Free", Length=1mm, Military Standard=Not, Number of Pins=2, Number of Terminations=2, Packaging="Tape and Reel", Reach SVHC Compliant=Yes, RoHS Compliant=Yes, Series=RC, Size Code=0402, Technology="THICK FILM", Termination=SMD/SMT, Tolerance=1%, Voltage Rating (DC)=50V, Width=0.5mm
R3: library part CMP-1011-00438-1, "240R 0.063W 1% 0402 (1005 Metric)  SMD", Case-EIA=0402, Case-Metric=1005, Power="0.063 W", Tolerance="1 %", Technology=SMT
U1: library part CMP-209535-000001-1, "LDO Voltage Regulators 1A, 3.3V", Dropout Voltage=1.1V, Manufacturer="Advanced Monolithic Systems", Max Junction Temp=+125°C, Max Power Dissipation=1.2W, Max Supply Voltage=15V, Nominal Supply Current=5mA, Output Current=1A, Output Voltage=3.3V, Package=AMS1117, Temperature="-40°C to +125°C", Temperature Range Low=-40°C, Automotive=No, Category=IC, ComponentLink2Description=Datasheet, ComponentLink2URL=http://www.advanced-monolithic.com/pdf/ds1117.pdf, Device Class L1="Integrated Circuits (ICs)", Device Class L2="Power Management ICs", Device Class L3="Voltage Regulators - Linear", Height=1.8mm, Ipc Land Pattern Name=SOT229P700X180-4, Lead Free=Yes, Manufacturer Part Number=AMS1117-3.3, Number Of Outputs=1, Octopart=https://octopart.com/ams1117-3.3-advanced+monolithic+systems-25899300, Output Type=Fixed, RoHS=TRUE, Standoff Height=0.64mm, Temperature Range High=+125°C
U2 U3 U4: library part CMP-209535-000001-1, "LDO Voltage Regulators 1A, 3.3V", Dropout Voltage=1.1V, Manufacturer="Advanced Monolithic Systems", Manufacturer Part Number=AMS1117-3.3, Max Junction Temp=+125°C, Max Power Dissipation=1.2W, Max Supply Voltage=15V, Nominal Supply Current=5mA, Output Current=1A, Output Voltage=3.3V, Package=AMS1117, Temperature="-40°C to +125°C", Temperature Range Low=-40°C, Automotive=No, Category=IC, ComponentLink2Description=Datasheet, ComponentLink2URL=http://www.advanced-monolithic.com/pdf/ds1117.pdf, Device Class L1="Integrated Circuits (ICs)", Device Class L2="Power Management ICs", Device Class L3="Voltage Regulators - Linear", Height=1.8mm, Ipc Land Pattern Name=SOT229P700X180-4, Lead Free=Yes, Number Of Outputs=1, Octopart=https://octopart.com/ams1117-3.3-advanced+monolithic+systems-25899300, Output Type=Fixed, RoHS=TRUE, Standoff Height=0.64mm, Temperature Range High=+125°C
U5: library part CMP-06255-000023-1, "MEMS OSC XO 33.3300MHZ CMOS SMD", Case/Package=SMD/SMT, Frequency=33.33MHz, Frequency Stability=50ppm, Load Capacitance=15pF, Max Operating Temperature=85°C, Max Supply Current=7.2mA, Max Supply Voltage=3.6V, Min Operating Temperature=-40°C, Min Supply Voltage=1.7V, Operating Supply Voltage=3.3V, Package Quantity=140, Ratings=AEC-Q100, Height=0.035inch, Lead Free="Lead Free", Length=0.098inch, Max Duty Cycle=55%, Mount="Surface Mount", Packaging=Rail/Tube, RoHS Compliant=Yes, Series=DSC1001, Termination=Solder, Width=0.079inch
U6: library part CMP-014-000000-1, "Zynq-7000 All Programmable SoC, BGA-400", Manufacturer_Name=AMD, Mouser Part Number=217-XC7Z020-1CLG400C, Datasheet Link=http://www.xilinx.com/support/documentation/data_sheets/ds190-Zynq-7000-Overview.pdf, Design Item ID=XC7Z020-1CLG400C, Geometry.Height=1.6mm, Manufacturer_Part_Number=XC7Z020-1CLG400C, Mouser Price/Stock=https://www.mouser.co.uk/ProductDetail/AMD-Xilinx/XC7Z020-1CLG400C?qs=rrS6PyfT74eaxuOsP%2FGL4g%3D%3D, Source=XC7Z020-1CLG400C.SchLib
U7 U8: library part CMP-2000-07475-2, "IC DRAM 4G PARALLEL 96FBGA", Manufacturer=Micron, Max Supply Voltage=1.45V, Min Supply Voltage=1.283V, Nominal Supply Current=12-156mA, Package=TW, Temperature="0°C to +85°C", Temperature Range High=+85°C, Temperature Range Low=0°C, Access Time=1.07ns, Automotive=No, Category=IC, ComponentLink2Description=Datasheet, ComponentLink2URL=https://www.micron.com/-/media/client/global/documents/products/data-sheet/dram/ddr3/4gb_ddr3l.pdf, Device Class L1="Integrated Circuits (ICs)", Device Class L2=Memory, Device Class L3=RAM, Digikey Description="IC DRAM 4G PARALLEL 96FBGA", Height=1.2mm, Interface=Parallel, Lead Free=Yes, Manufacturer Part Number=MT41K256M16TW-107:P, Memory Size=4Gbits, Memory Type=SDRAM,DDR3, Octopart=https://octopart.com/mt41k256m16tw-107%3Ap-micron-66533852, RoHS=TRUE, Standoff Height=0.29mm

## Via types
v1: diameter 50, hole 28, Top Layer to Bottom Layer, 46 vias

## Nets (pads, with @x,y where several pads share a name; then routed paths per layer and width w, separated by ;. In a path a pad name is that pad's centre, name@x,y a point inside that pad or via, vN(x,y) a via of type N, cw(c..) or ccw(c..) an arc to the next point about the centre after c; other vN are vias at no path point)
1.5V: C19.2 C20.1 C21.1 C22.1 C23.1 R1.2 U3.2 U3.4 U6.A3 U6.D2 U6.E5 U6.G1 U6.H4 U6.L3 U6.P2 U6.R5 U6.U1 U6.V4 U8.A1 U8.A8 U8.B2 U8.C1 U8.C9 U8.D2 U8.D9 U8.E9 U8.F1 U8.G7 U8.H2 U8.H9 U8.K2 U8.K8 U8.N1 U8.N9 U8.R1 U8.R9 | length 14693.1
  Top Layer w10: v1(3043,3067.52) U6.U1 ; v1(3043,3382.48) U6.G1 ; U6.A3 v1(3201.02,3614) ; U3.2 U3.4 ; C19.2 4550,4113 4329,4334 3914.72,4334 U3.4 ; R1.2 5307.68,4172.63 C20.1 ; v1(5568,3492) 5568,3573 ; v1(5571.45,3337) 5571.45,3203.83 5645,3130.28 5668.87,3130.28 ; U8.R1 5668.87,3130.28 ; U8.N1 5746.15,3193.27 5726.42,3213 5679.15,3213 5666.15,3200 5666.15,3133 5668.87,3130.28 ; U8.F1 5713.26,3413.74 v1(5671,3456) v1(5671,3509) 5671,3660 5690,3679 5760,3679 5780,3659 5780,3612 ; U8.C1 5827.47,3508.23 5807.24,3488 5756.1,3488 5731,3513.1 5731,3563 5760,3592 ; U8.A1 5829.02,3580 5817.02,3592 5760,3592 ; C23.1 5726.69,4435.32 5722,4430.63 C22.1 ; v1(5974.5,3574.5) 5995,3595 6027.58,3595 6041,3580.43 ; v1(5975,3456) 5975,3418 6000,3393 6007.24,3393 U8.G7 ; U8.E9@6075.75,3440 U8.E9 ; U8.R9 v1(6143,3130.28) ; U8.N9 6265.27,3193.27 ; U8.H9 6129.25,3350.75 v1(6143,3337) ; U8.C9 U8.D9 ; v1@6126,3446 v1(6116,3456) ; U3.4 3914.72,4430 4228,4430 4274,4476 4551,4476 4591.68,4435.32 C20.1 ; C20.1 5280.63,4445.32 C21.1 5295.32,4445.31 5310,4430.63 C22.1 ; C22.1 5829.02,4181.61 5829.02,3661.02 5780,3612 ; 5760,3592 5780,3612 ; 6041,3580.43 U8.A8 6041,3579.71 6041,3580.43 ; U8.E9 6105.24,3445.24 v1(6116,3456) ; U8.E9 U8.D9 ; U8.D9 6095.27,3476.73 v1(6116,3456)
  Bottom Layer w10: v1(3043,3382.48) 3043,3126 ; v1(3201.02,3614) 3155.02,3568 3040,3568 3014,3542 3014,3126 3043,3126 ; v1(5568,3492) v1@5688,3492 ; v1(5571.45,3337) 5843,3337 ; v1(5671,3509) v1@5688,3492 ; v1(5974.5,3574.5) 5856,3456 ; v1(6143,3130.28) v1(6143,3337) ; 6265.27,3193.27 6266,3194 6266,3214 v1(6143,3337) ; v1(3043,3067.52) 3043,3126 ; v1(3043,3067.52) 3223,2888 ; v1(3043,3067.52) 3043.48,3067.52 3223,2888 ; 3223,2888 4483,2888 4613,2758 5418,2758 5880,3220 5880,3300 5843,3337 ; v1@5688,3492 5707,3492 5697.5,3482.5 ; v1@5688,3492 5697.5,3482.5 ; 5697.5,3482.5 5724,3456 ; 5697.5,3482.5 v1(5671,3456) 5724,3456 ; 5724,3456 5843,3337 ; 5724,3456 5856,3456 ; 5843,3337 v1(6143,3337) ; 5856,3456 v1(5975,3456) v1(6116,3456) 6143,3429 v1(6143,3337)
1.8V: C14.2 C15.1 C16.1 C17.1 C18.1 U4.2 U4.4 U6.F8 U6.G9 U6.H8 U6.J9 U6.J11 U6.K8 U6.L11 U6.M8 U6.N9 U6.N11 U6.P10 U6.R9 | length 7364.1
  Top Layer w10: C18.1 3612,2695.32 3617,2700.32 C17.1 ; C16.1 3955,2760 4014.68,2700.32 ; U4.2 U4.4 4394.72,4317.28 4732,3980 4732,2744 4688.32,2700.32 4014.68,2700.32 ; C14.2 6100,1644.61 6112,1632.61 6112,1555 6100,1543 5381,1543 5160,1764 C15.1 4410,2090.32 C17.1 ; C17.1 4014.68,2700.32
1V0: C1.2 C2.1 C3.1 C4.1 C5.1 C6.1 U2.2 U2.4 U6.G7 U6.G13 U6.H12 U6.J7 U6.J13 U6.K12 U6.L7 U6.L13 U6.M12 U6.N7 U6.N13 U6.P8 U6.P12 U6.R7 U6.R13 | length 7838.2
  Top Layer w10: C2.1 2955.32,1786.68 2980,1762 3417.32,1762 C3.1 ; U2.2 U2.4 3414.72,4049.55 3885.63,3578.64 C6.1 3885.63,3078.37 3893,3071 3893,2941 3744,2792 3440,2792 3385,2737 3385,2090 ; v1(3428,2047) 3385,2090 ; C5.1 3470.32,1584.68 C3.1 ; C1.2 v1(5434.61,2047) ; v1(5802.32,2047) C4.1 ; 3385,2090 3385,1900.32 C3.1
  Bottom Layer w10: v1(3428,2047) v1(5434.61,2047) v1(5802.32,2047)
3.3V: 10K.2 C7.2 C8.1 C9.1 C10.1 C11.1 C12.1 C13.1 H.1 R.1 U1.2 U1.4 U5.1 U5.4 U6.A13 U6.B6 U6.B16 U6.C19 U6.D7 U6.D12 U6.E15 U6.F18 U6.H14 U6.J17 U6.K6 U6.K20 U6.M6 U6.M16 U6.N19 U6.R15 U6.T8 U6.T18 U6.U11 U6.V14 U6.W7 U6.W17 U6.Y10 U6.Y20 | length 13614.2
  Top Layer w10: 10K.2 2260,2779.9 2270,2769.9 2270,2405 ; H.1 2270,1235 2270,2405 ; U5.1 U5.4 ; U1.4 U1.2 2670,4380 2635,4345 2635,4158 2645.51,4147.49 U5.4 ; C13.1 3129.37,2380.63 C12.1 2880,2510 2840,2550 C11.1 ; v1(3295,2298) 3313,2316 3313,2811.5 3431.5,2930 3451.5,2930 ; U6.Y10 3421.5,2960 3451.5,2930 ; U6.A13 3515.98,3667.02 3463,3720 ; v1(3537,2930) 3451.5,2930 ; U6.Y20 3795.03,2973.03 v1(3833,3011) ; U6.K20 3785.01,3287.99 3833,3240 v1(3833,3092) ; v1(5546,1684) 5750.61,1684 5794.61,1640 C7.2 5933,1620 5999,1686 6132,1686 6181,1637 6181,1169.27 6170,1158.27 R.1 ; 2270,2405 C11.1 ; U5.4 3200.52,3982.48 3463,3720 ; C11.1 2855,2990 C10.1 2840.63,3170 2830,3170 2830,3254 2835,3259 C9.1 C8.1 2835,3680 2875,3720 3463,3720
  Bottom Layer w10: H.1 3295,2160 ; v1(3295,2298) 3295,2160 ; v1(3537,2930) 3671,2930 v1(3833,3092) v1(3833,3011) ; v1(5546,1684) 3360,1684 3295,1749 3295,2160
5V_IN: J.1 U1.3 U2.3 U3.3 U4.3 | length 2426.7
  Top Layer w10: J.1 2386.81,4486.81 2441,4541 2954,4541 2965,4530 2965,4349.84 2940,4324.84 ; U1.3 2940,4324.84 ; U2.3 v1(3057.47,4309.84) 3042.47,4324.84 2940,4324.84 ; v1(3485.84,4309.84) U3.3 3887,4309.84 3902,4294.84 U4.3
  Bottom Layer w10: v1(3057.47,4309.84) v1(3485.84,4309.84)
A0: U6.N2 U7.N3
A1: U6.K2 U7.P7
A2: U6.M3 U7.P3
A3: U6.K3 U7.N2
A4: U6.M4 U7.P8
A5: U6.L1 U7.P2
A6: U6.L4 U7.R8
A7: U6.K4 U7.R2
A8: U6.K1 U7.T8 | length 1854.4
  Top Layer w10: v1(3092,3259) 3120.99,3287.99 U6.K1 ; v1(4634,2798) 4664.49,2828.49 U7.T8
  Bottom Layer w10: v1(3092,3259) 4173,3259 v1(4634,2798)
A9: U6.J4 U7.R3
A10: U6.F5 U7.L7 | length 37.9
  Top Layer w10: v1(4595.13,3006.26) U7.L7
A11: U6.G4 U7.R7
A12: U6.E4 U7.N7 | length 37.9
  Top Layer w10: v1(4595.13,2943.27) U7.N7
A13: U6.D4 U7.T3
A14: U6.F4 U7.T7
BA0: U6.L5 U7.M2
BA1: U6.R4 U7.N8
BA2: U6.J5 U7.M3
CAS#: U6.P5 U7.K3
CK: U6.L2 U7.J7 | length 37.9
  Top Layer w10: v1(4595.13,3069.25) U7.J7
CK#: U6.M2 U7.K7
CKE: U6.N3 U7.K9
CS#: U6.N1 U7.L2
DQ0: U6.C3 U7.E3
DQ1: U6.B3 U7.F7
DQ2: U6.A2 U7.F2
DQ3: U6.A4 U7.F8
DQ4: U6.D3 U7.H3
DQ5: U6.D1 U7.H8
DQ6: U6.C1 U7.G2
DQ7: U6.E1 U7.H7 | length 2097
  Top Layer w10: v1(3054,3521) 3122,3453 3130.5,3453 U6.E1 ; v1(4590,3521) 4590,3130.75 4620,3100.75 U7.H7
  Bottom Layer w10: v1(3054,3521) v1(4590,3521)
DQ8: U6.E2 U7.D7
DQ9: U6.E3 U7.C3 | length 37.9
  Top Layer w10: U7.C3 v1(4544.87,3258.23)
DQ10: U6.G3 U7.C8
DQ11: U6.H3 U7.C2
DQ12: U6.J3 U7.A7
DQ13: U6.H2 U7.A2
DQ14: U6.H1 U7.B8
DQ15: U6.J1 U7.A3 | length 2345.6
  Top Layer w10: v1(2923,3369) 2972.51,3319.49 U6.J1 ; v1(4159.94,3755) 4507.01,3407.93 U7.A3
  Bottom Layer w10: v1(2923,3369) 2923,3600.57 3077.43,3755 v1(4159.94,3755)
FPGA_LED: D.1 U6.M19 | length 96.6
  Top Layer w10: v1(5768.54,1170) 5793.07,1145.47 D.1
GND: Button.2 C1.1 C2.2 C3.2 C4.2 C5.2 C6.2 C7.1 C8.2 C9.2 C10.2 C11.2 C12.2 C13.2 C14.1 C15.2 C16.2 C17.2 C18.2 C19.1 C20.2 C21.2 C22.2 C23.2 H.2 J.5 J.6 J.7 J.8 J.9 J.10 J.11 R2.1 R3.2 U1.1 U2.1 U3.1 U5.2 U6.A8 U6.A18 U6.B1 U6.B11 U6.C4 U6.C9 U6.C14 U6.D17 U6.E10 U6.E20 U6.F3 U6.F7 U6.G10 U6.G12 U6.G16 U6.H7 U6.H9 U6.H11 U6.H13 U6.H19 U6.J2 U6.J8 U6.J10 U6.J12 U6.K5 U6.K7 U6.K9 U6.K10 U6.K11 U6.K13 U6.K15 U6.L8 U6.L9 U6.L10 U6.L12 U6.L18 U6.M1 U6.M7 U6.M11 U6.M13 U6.N4 U6.N8 U6.N10 U6.N12 U6.N14 U6.P7 U6.P9 U6.P11 U6.P13 U6.P17 U6.R8 U6.R12 U6.R20 U6.T3 U6.T7 U6.T13 U6.U6 U6.U16 U6.V9 U6.V19 U6.W2 U6.W12 U6.Y5 U6.Y15 U8.A9 U8.B1 U8.B3 U8.B9 U8.D1 U8.D8 U8.E1 U8.E2 U8.E8 U8.F9 U8.G1 U8.G8 U8.G9 U8.J2 U8.J8 U8.M1 U8.M9 U8.P1 U8.P9 U8.T1 U8.T9 | length 38722.9
  Top Layer w10: 2219.47,4526.22 2240,4526.22 2250,4516.22 J.10 2219.47,4475 2219.47,4297.87 2416.87,4297.87 2624.16,4505.16 ; J.11 J.11@2252,4396.26 ; H.2 2895,1860 2950,1860 ; J.7 2356.3,4375 ; U5.2 2564.48,3917.52 2552,3930 2552,4356.41 ; U6.M1 3131.16,3218.12 2984.83,3218.12 2874.37,3328.58 ; U6.B1 3114,3539.96 3078.96,3575 2884.37,3575 C8.2 ; U6.Y5 3264.02,2504.02 C13.2 ; U6.L8 U6.L9 U6.L10 U6.K10 ; U6.A8 3358.5,3640 3300.5,3698 2987.37,3698 C8.2 ; U6.K9 U6.K10 ; U6.J10 U6.K10 ; U6.K11 U6.K10 ; U6.Y15 3578.98,2956.02 3590,2945 3836,2945 ; U3.1 3420,4490.16 ; U6.A18 3673.46,3586.54 3686.93,3600 3744.86,3600 ; U6.R20 3746.49,3130.51 3777,3100 3777,3074 3800,3051 3862,3051 3873,3040 3873,2982 3836,2945 ; U6.E20 3752.47,3445.47 3783,3476 3783,3561.86 3744.86,3600 ; v1(4302,3800) 4140.31,3800 C16.2 ; v1(4501,3590) C19.1 ; R3.2 4880,1150 4870,1160 C5.2 ; C20.2 5055.31,4485 5321,4485 5321,4473.69 C21.2 5344.69,4470 C22.2 5722,4470 5726.69,4474.69 C23.2 5880.31,4474.69 5915,4440 v1(5915,3639) 5915,3583 ; R2.1 5262.32,2232 C15.2 5335.71,2129.69 5385.39,2080 C1.1 5385.39,1600 5413.39,1572 5440,1572 ; v1(5618,3233) 5820.78,3233 U8.M1 ; v1(5631,3559) 5631,3416 5664.76,3382.24 U8.G1 ; v1(5707,3173) 5718.23,3161.77 U8.P1 ; v1(5711,3639) 5711,3492 5757.76,3445.24 U8.E1 ; C7.1 5488,1620 5466,1598 ; v1(5782.72,3539.72) U8.B1 ; U8.T1 5829.02,2994.02 ; U8.D1 U8.E1 ; U8.E2 U8.E1 ; v1(5870.5,3627.5) 5880,3618 5915,3583 ; U8.B3 5900,3539.72 5915,3524.72 ; U8.G8 U8.G9 ; U8.E8 U8.D8 ; C14.1 6080,1572 5440,1572 ; U8.P9 6090.21,3171 6220,3171 6230,3161 6230,3129 6169,3068 6111.76,3068 U8.T9 6080.98,2680 6103.67,2657.31 6280,2657.31 6323,2700.31 ; U8.F9 U8.G9 ; J.11@2252,4396.26 2297,4396.26 2308.81,4384.45 J.5 2356.3,4375 ; J.11@2252,4396.26 2252,4375 2356.3,4375 ; 2356.3,4375 2392,4375 2522.16,4505.16 2624.16,4505.16 ; 2552,4356.41 2670,4474.41 U1.1 2624.16,4505.16 ; 2552,4356.41 2211.81,4016.22 Button.2 2211.81,3460 2169,3417.19 2169,1250 2280,1139 2880,1139 2930,1189 2930,1737 ; 2874.37,3328.58 2874.37,3214.37 C10.2 2870,3195 2880,3185 2880,2975 C11.2 2879.37,2670 C12.2 3050.63,2549.37 C13.2 ; 2874.37,3328.58 C9.2 C8.2 ; 2930,1737 3577,1090 3876,1090 3934.37,1148.37 C5.2 ; 2930,1737 2930,1840 2950,1860 ; 2950,1860 2974.69,1860 2994.69,1840 C2.2 3347,2167.31 3347,2280 ; C13.2 3195,2420 3205,2410 3205,2330.63 3285.63,2250 3317,2250 3347,2280 ; 3347,2280 3347,2772 3415,2840 3731,2840 3836,2945 ; 3420,4490.16 U2.1 3155.28,4449 3120,4413.72 3120,4369 3140,4349 3288,4349 3357,4280 3357,3987.86 3744.86,3600 ; 3420,4490.16 3450,4460.16 3450,4340 3445,4335 3445,4124.69 C16.2 ; C5.2 3934.37,1390.32 C3.2 3509.69,2396.31 3405,2501 3405,2712 3420,2727 3422.31,2727 C18.2 3607,2734.69 3612,2739.69 C17.2 3925,2864.69 C6.2 3925,3600 3939.69,3614.69 C16.2 ; 5440,1572 5466,1598 ; 5466,1598 5466,1676 5785.37,1995.37 5870.06,1995.37 5914.69,2040 C4.2 ; 5829.02,2994.02 5915,3080 5915,3524.72 ; 5829.02,2994.02 5829.02,2325.36 5914.69,2239.69 C4.2 ; C4.2 6323,2528.31 6323,2700.31 ; 5915,3524.72 5915,3583 ; 5915,3583 5971,3639 6024.02,3639 6080.98,3582.03 U8.A9 ; U8.G9 6132.11,3415.26 6236.94,3415.26 6112.48,3539.72 ; U8.G9 6160,3382.24 6200,3342.24 6200,3324 6110,3234 U8.M9 6323,3211 6323,2700.31 ; U8.A9 6112.48,3539.72 ; U8.A9 U8.B9 6112.48,3539.72
  Bottom Layer w10: J.8 2273.42,4550 2356.3,4550 J.6 ; v1(4302,3800) 5754,3800 v1(5915,3639) v1(5711,3639) 5662,3590 ; v1(4501,3590) 5261,3590 ; v1(5631,3559) 5662,3590 ; v1(5707,3173) 5678,3173 v1(5618,3233) 5261,3590 ; v1(5782.72,3539.72) 5833,3590 ; v1(5870.5,3627.5) 5833,3590 ; v1@5880,3618 5852,3590 5833,3590 ; 5261,3590 5662,3590 ; 5662,3590 5833,3590
LDM: U6.A1 U7.E7 | length 2270.1
  Top Layer w10: 3081,3628.49 U6.A1 ; U7.E7 4620,3195.24 4610,3205.24 4610,3331.61 4692,3413.61 v1(4692,3695)
  Bottom Layer w10: 3081,3628.49 3147.51,3695 v1(4692,3695)
LDQS: U6.C2 U7.F3
LDQS#: U6.B2 U7.G3
Net10K_1: 10K.1 Button.3 U6.C7 | length 454.6
  Top Layer w10: 10K.1 2230,2750.1 2220,2760.1 2220,2867.81 2388.19,3036 Button.3
NetD_2: D.2 R.2 | length 305.3
  Top Layer w10: D.2 5998,1204.53 6010.8,1191.73 R.2
NetR1_1: R1.1 R2.2 U8.H1 U8.M8 | length 1163.1
  Top Layer w10: R1.1 5270,3560 ; R2.2 5300,3292 5270,3322 5270,3560 ; U8.H1 5630.25,3350.75 5444,3537 5293,3537 5270,3560
NetR3_1: R3.1 U7.L8
ODT: U6.N5 U7.K1
PS_CLK_50M: U5.3 U6.E7 | length 94.7
  Top Layer w10: U5.3 2715.44,3917.52 v1(2732.96,3900)
RAS#: U6.P4 U7.J3
RESET#: U6.B4 U7.T2
TCK_0: H.3 U6.F9
TDI_0: H.5 U6.G6
TDO_0: H.6 U6.F6
TMS_0: H.4 U6.J6
UDM: U6.F1 U7.D3 | length 2735.2
  Top Layer w10: v1(2963,3480) 3048,3480 3114.02,3413.98 U6.F1 ; U7.D3 4514.74,3219 4520,3219 4530,3209 4530,2801 v1(4510,2781)
  Bottom Layer w10: v1(2963,3480) 2963,3088 3270,2781 v1(4510,2781)
UDQS: U6.G2 U7.C7
UDQS#: U6.F2 U7.B7
WE#: U6.M5 U7.L3
pads on no net: Button.1 Button.4 J.2 J.3 J.4 U4.1 U6.A5 U6.A6 U6.A7 U6.A9 U6.A10 U6.A11 U6.A12 U6.A14 U6.A15 U6.A16 U6.A17 U6.A19 U6.A20 U6.B5 U6.B7 U6.B8 U6.B9 U6.B10 U6.B12 U6.B13 U6.B14 U6.B15 U6.B17 U6.B18 U6.B19 U6.B20 U6.C5 U6.C6 U6.C8 U6.C10 U6.C11 U6.C12 U6.C13 U6.C15 U6.C16 U6.C17 U6.C18 U6.C20 U6.D5 U6.D6 U6.D8 U6.D9 U6.D10 U6.D11 U6.D13 U6.D14 U6.D15 U6.D16 U6.D18 U6.D19 U6.D20 U6.E6 U6.E8 U6.E9 U6.E11 U6.E12 U6.E13 U6.E14 U6.E16 U6.E17 U6.E18 U6.E19 U6.F10 U6.F11 U6.F12 U6.F13 U6.F14 U6.F15 U6.F16 U6.F17 U6.F19 U6.F20 U6.G5 U6.G8 U6.G11 U6.G14 U6.G15 U6.G17 U6.G18 U6.G19 U6.G20 U6.H5 U6.H6 U6.H10 U6.H15 U6.H16 U6.H17 U6.H18 U6.H20 U6.J14 U6.J15 U6.J16 U6.J18 U6.J19 U6.J20 U6.K14 U6.K16 U6.K17 U6.K18 U6.K19 U6.L6 U6.L14 U6.L15 U6.L16 U6.L17 U6.L19 U6.L20 U6.M9 U6.M10 U6.M14 U6.M15 U6.M17 U6.M18 U6.M20 U6.N6 U6.N15 U6.N16 U6.N17 U6.N18 U6.N20 U6.P1 U6.P3 U6.P6 U6.P14 U6.P15 U6.P16 U6.P18 U6.P19 U6.P20 U6.R1 U6.R2 U6.R3 U6.R6 U6.R10 U6.R11 U6.R14 U6.R16 U6.R17 U6.R18 U6.R19 U6.T1 U6.T2 U6.T4 U6.T5 U6.T6 U6.T9 U6.T10 U6.T11 U6.T12 U6.T14 U6.T15 U6.T16 U6.T17 U6.T19 U6.T20 U6.U2 U6.U3 U6.U4 U6.U5 U6.U7 U6.U8 U6.U9 U6.U10 U6.U12 U6.U13 U6.U14 U6.U15 U6.U17 U6.U18 U6.U19 U6.U20 U6.V1 U6.V2 U6.V3 U6.V5 U6.V6 U6.V7 U6.V8 U6.V10 U6.V11 U6.V12 U6.V13 U6.V15 U6.V16 U6.V17 U6.V18 U6.V20 U6.W1 U6.W3 U6.W4 U6.W5 U6.W6 U6.W8 U6.W9 U6.W10 U6.W11 U6.W13 U6.W14 U6.W15 U6.W16 U6.W18 U6.W19 U6.W20 U6.Y1 U6.Y2 U6.Y3 U6.Y4 U6.Y6 U6.Y7 U6.Y8 U6.Y9 U6.Y11 U6.Y12 U6.Y13 U6.Y14 U6.Y16 U6.Y17 U6.Y18 U6.Y19 U7.A1 U7.A8 U7.A9 U7.B1 U7.B2 U7.B3 U7.B9 U7.C1 U7.C9 U7.D1 U7.D2 U7.D8 U7.D9 U7.E1 U7.E2 U7.E8 U7.E9 U7.F1 U7.F9 U7.G1 U7.G7 U7.G8 U7.G9 U7.H1 U7.H2 U7.H9 U7.J1 U7.J2 U7.J8 U7.J9 U7.K2 U7.K8 U7.L1 U7.L9 U7.M1 U7.M7 U7.M8 U7.M9 U7.N1 U7.N9 U7.P1 U7.P9 U7.R1 U7.R9 U7.T1 U7.T9 U8.A2 U8.A3 U8.A7 U8.B7 U8.B8 U8.C2 U8.C3 U8.C7 U8.C8 U8.D3 U8.D7 U8.E3 U8.E7 U8.F2 U8.F3 U8.F7 U8.F8 U8.G2 U8.G3 U8.H3 U8.H7 U8.H8 U8.J1 U8.J3 U8.J7 U8.J9 U8.K1 U8.K3 U8.K7 U8.K9 U8.L1 U8.L2 U8.L3 U8.L7 U8.L8 U8.L9 U8.M2 U8.M3 U8.M7 U8.N2 U8.N3 U8.N7 U8.N8 U8.P2 U8.P3 U8.P7 U8.P8 U8.R2 U8.R3 U8.R7 U8.R8 U8.T2 U8.T3 U8.T7 U8.T8

## Polygon pours and split planes (outlines as drawn)
no net on Layer 1 (split plane): 6339.9,1070.1 2110.1,1070.1 2110.1,4594.9 6339.9,4594.9
no net on GND (split plane): 6339.9,1070.1 2110.1,1070.1 2110.1,4594.9 6339.9,4594.9
no net on Layer 2 (split plane): 6339.9,1070.1 2110.1,1070.1 2110.1,4594.9 6339.9,4594.9
no net on PWR (split plane): 6339.9,1070.1 2110.1,1070.1 2110.1,4594.9 6339.9,4594.9

## Text inside footprints (layer, text, board x,y; h text height)
J: Mechanical 6 "PCB EDGE" at 2188.98,4719.09 h11.81 r270